# Altium PCB Hack_Final.PcbDoc (part 1 of 3)
Units mm, origin at the board's own origin, x right, y up, seen from the top; angles counter-clockwise.
Board outline 325.37 x 149.48 mm, 4 copper layers (Top Layer, Layer 1, Layer 2, Bottom Layer), stack 0.603 mm thick; 363 components, 196 nets, 927 pads, 198 vias.
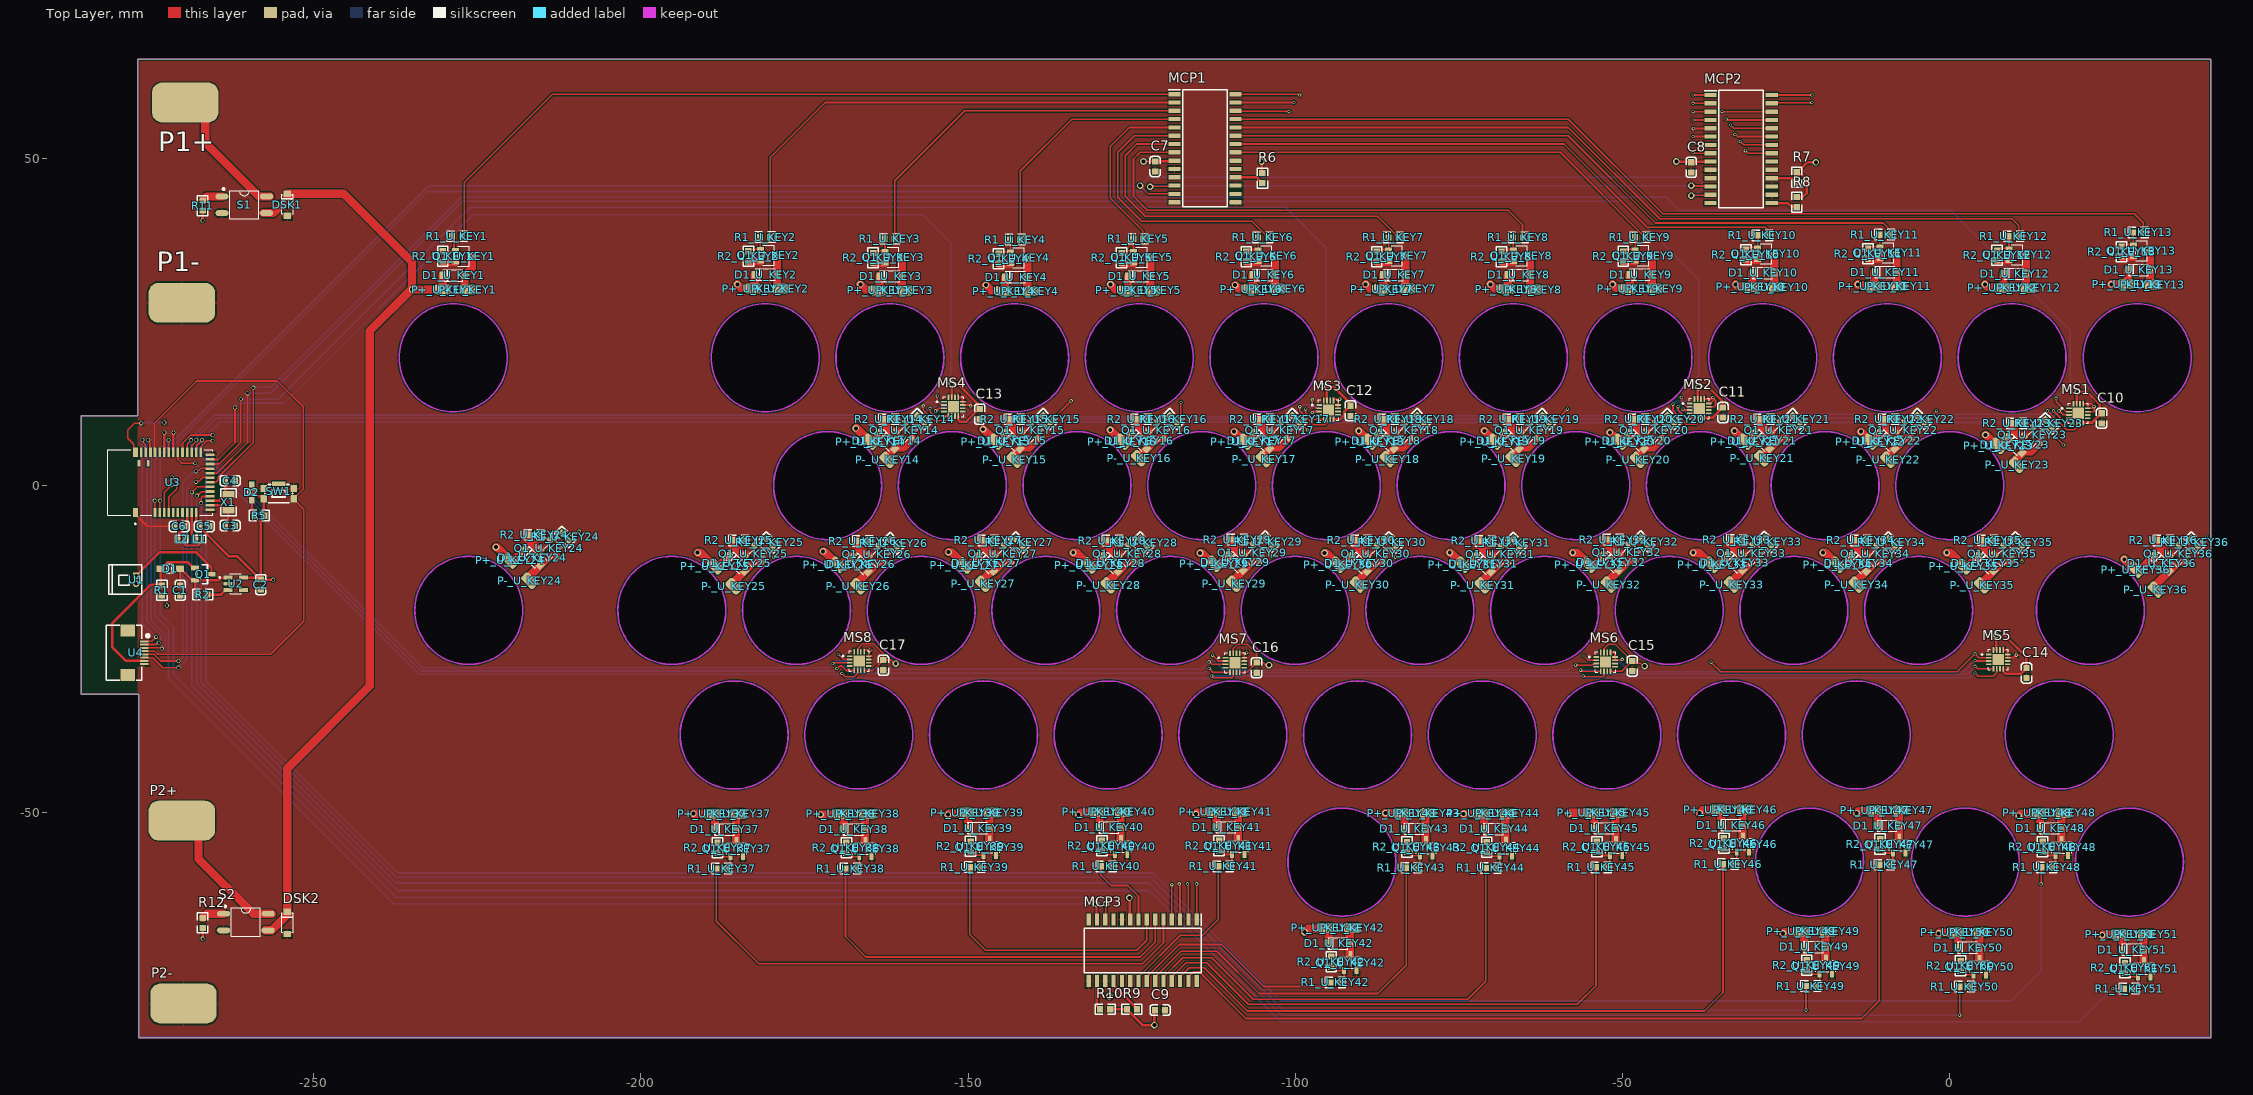
[diagram p0: Top Layer view]
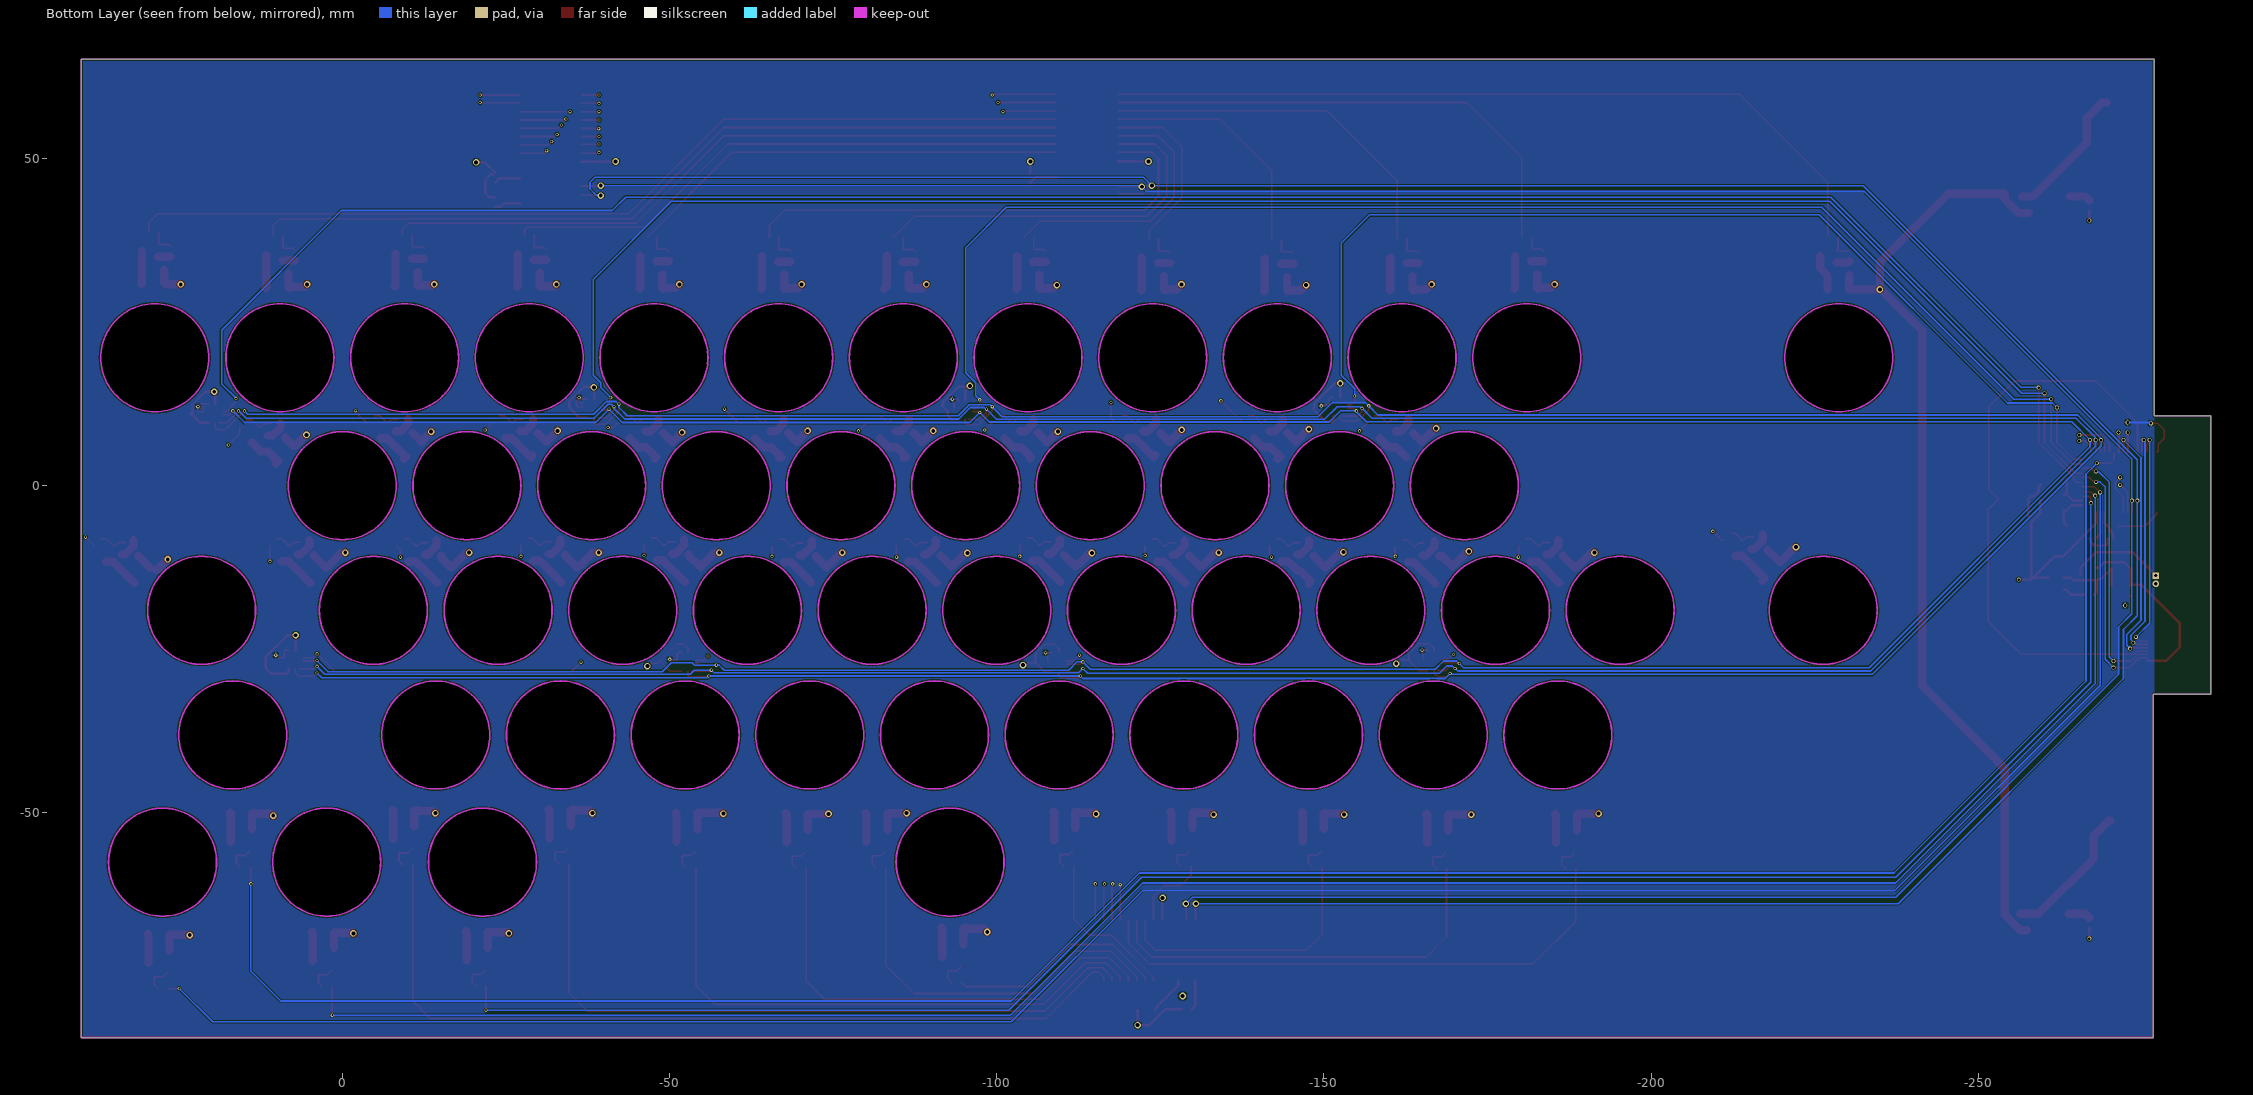
[diagram p1: Bottom Layer view, seen from below]
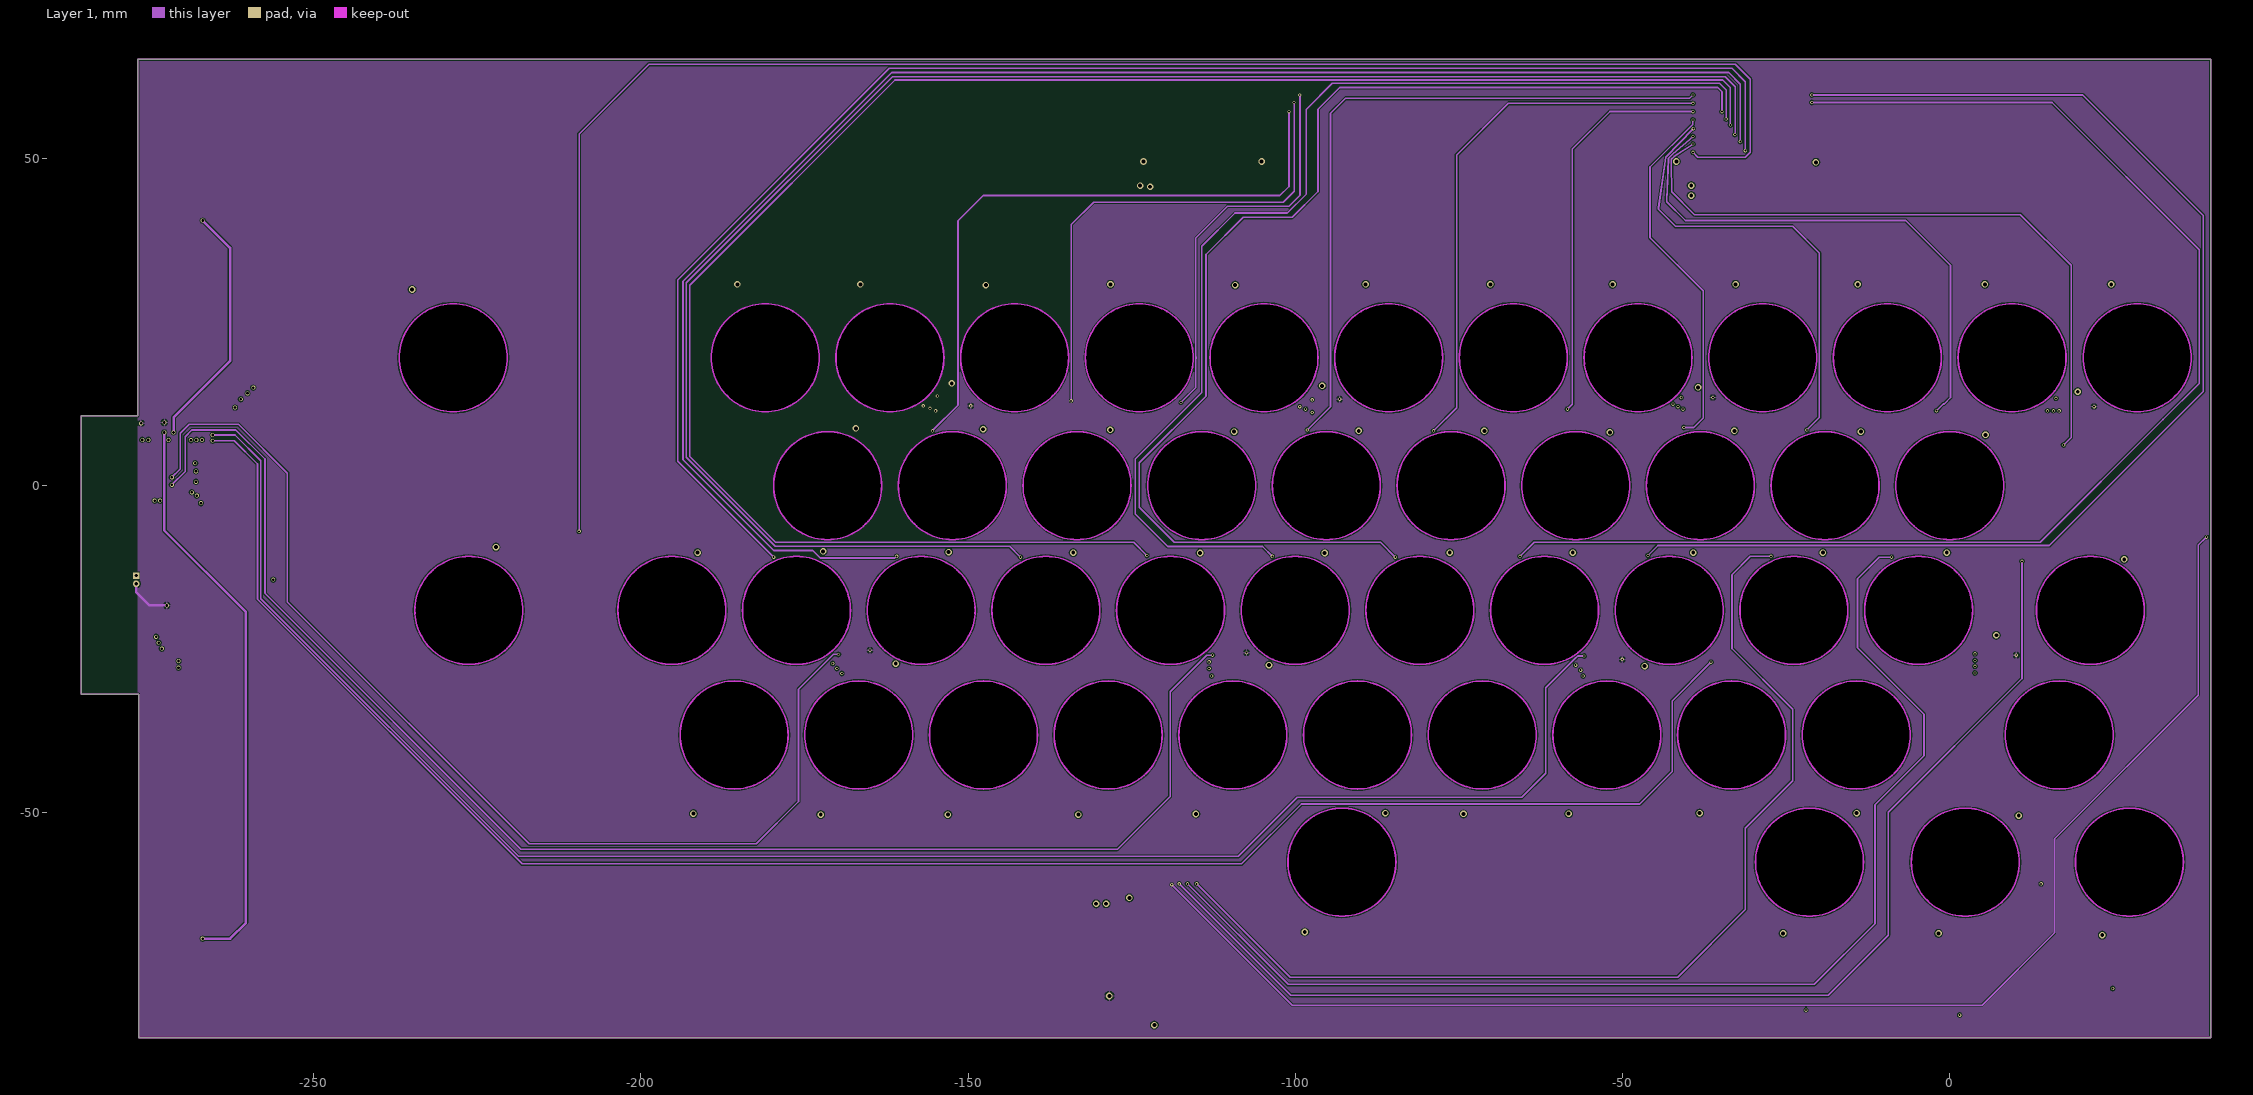
[diagram p2: Layer 1]
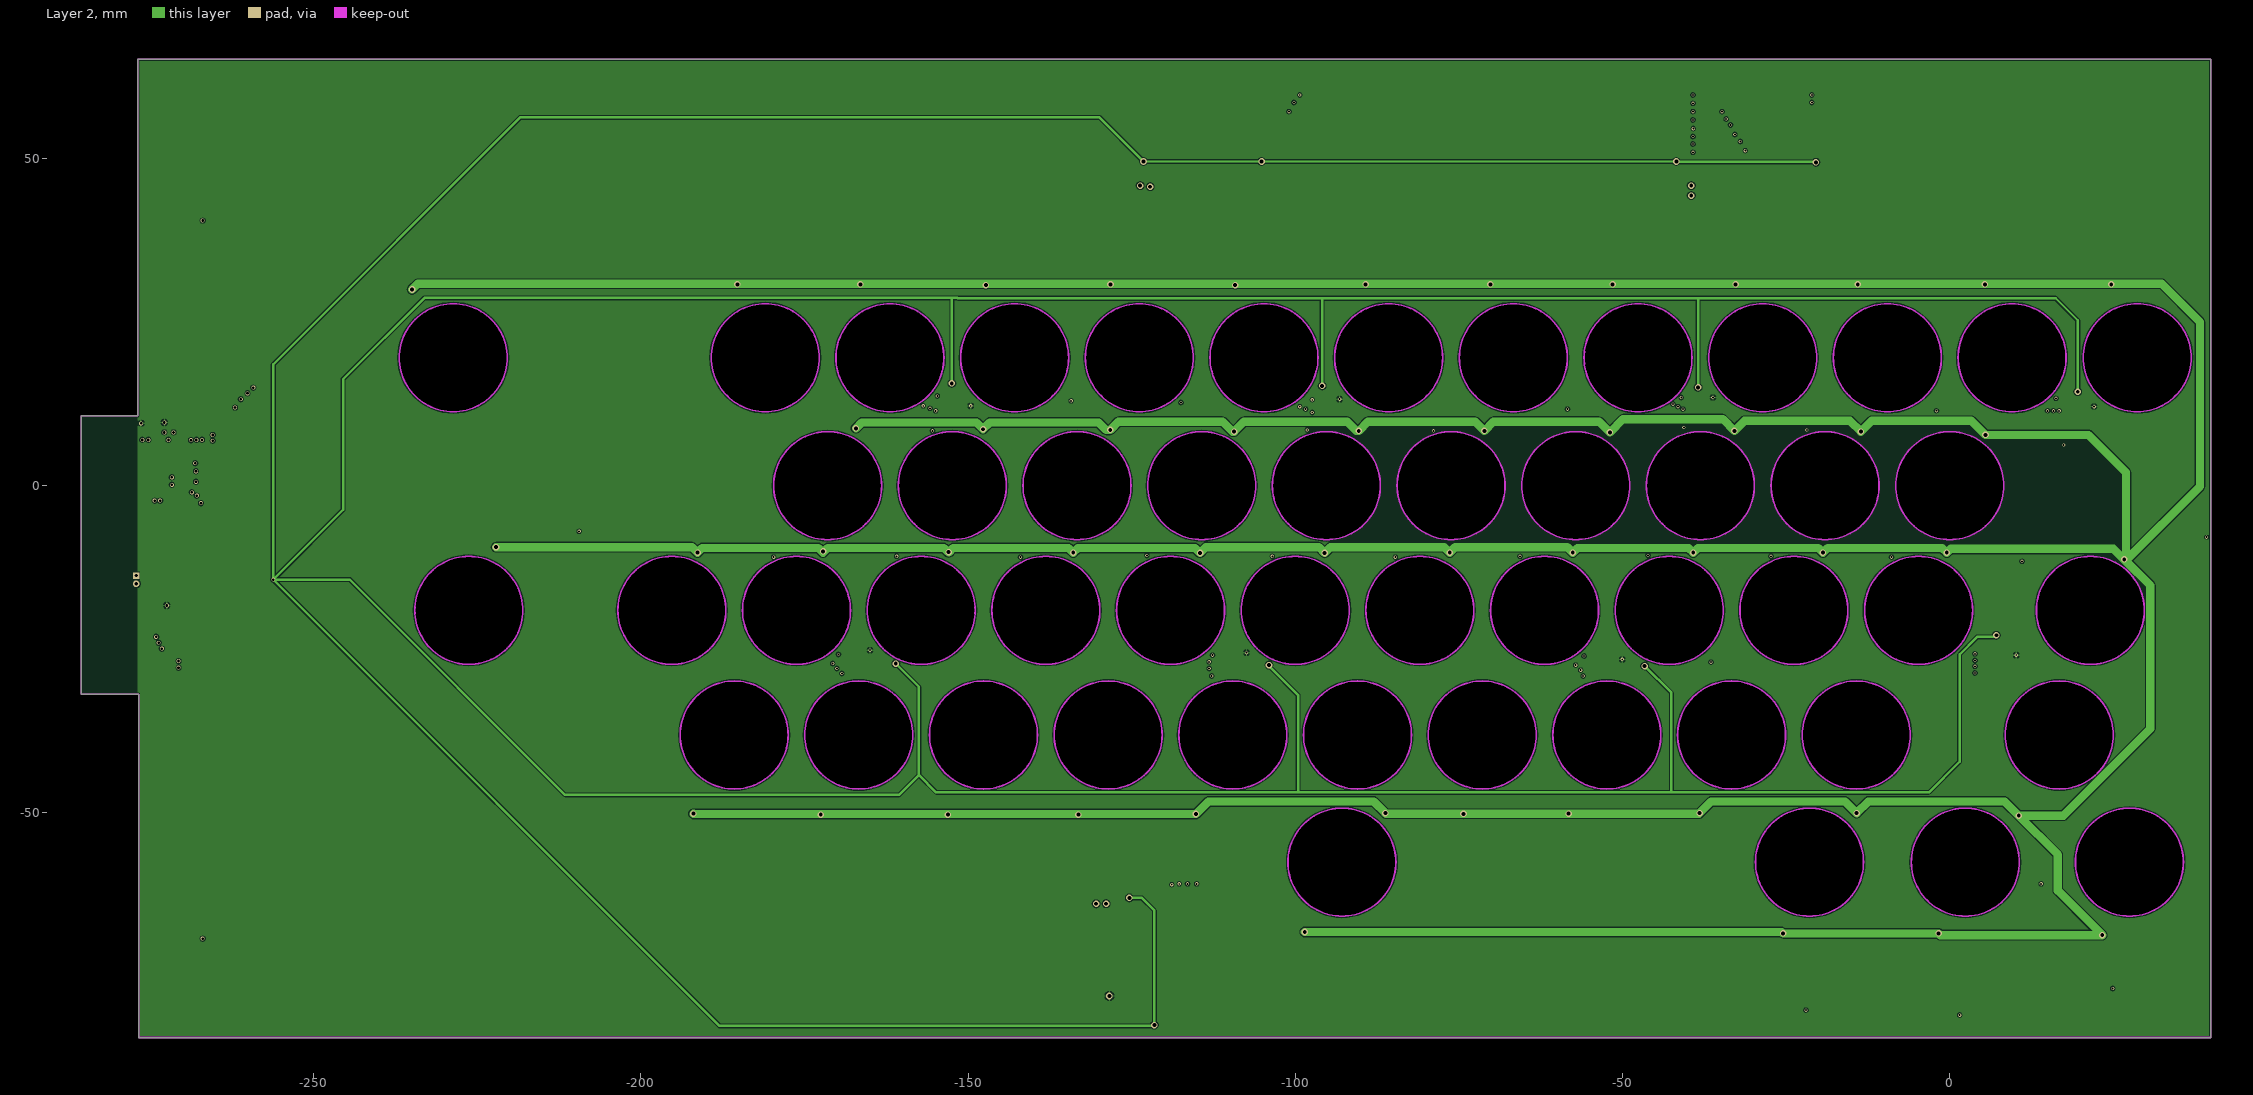
[diagram p3: Layer 2]
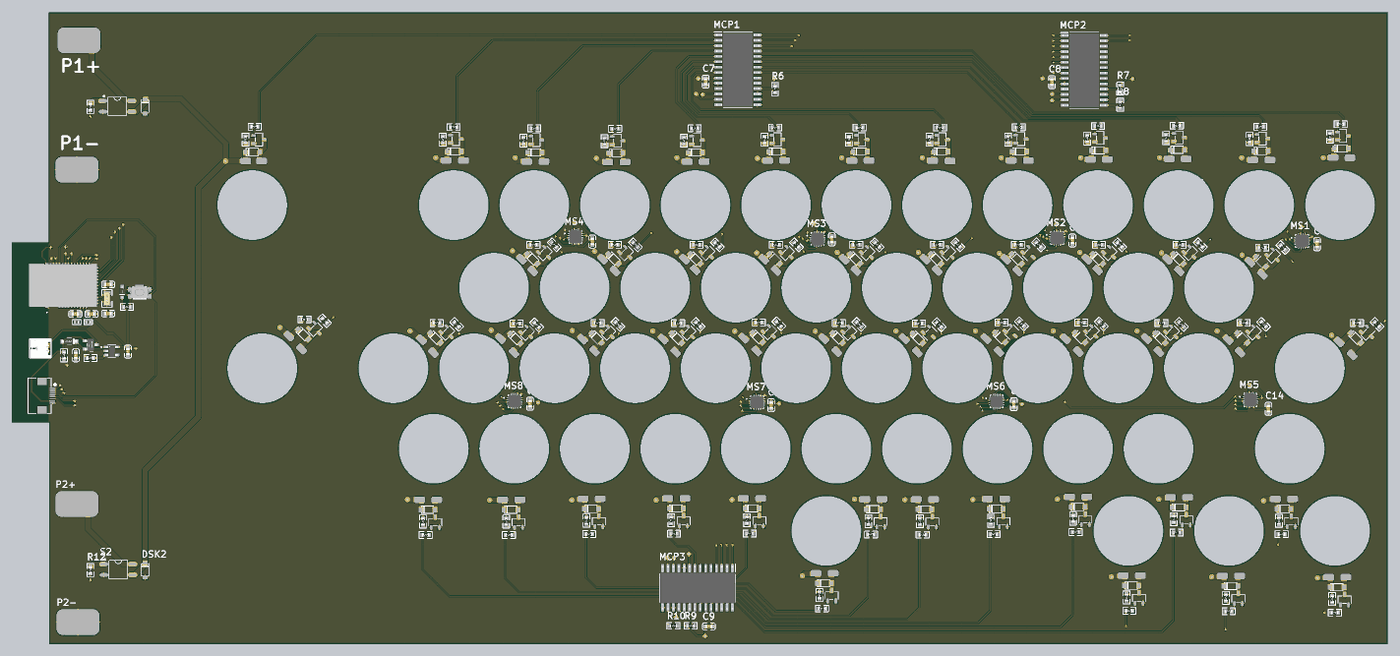
[diagram p6: 3D render of the assembled board from above, using the file's embedded part models]

## Layer stack, top to bottom
Top Solder: solder mask 0.0102, Solder Resist, Dk 3.5
Top Layer: signal copper 0.0356
Dielectric 2: prepreg 0.0711, PP-006, Dk 4.1
Layer 1: signal copper 0.035
Dielectric 1: dielectric 0.32, FR-4, Dk 4.8
Layer 2: signal copper 0.035
Dielectric 3: prepreg 0.0711, PP-006, Dk 4.1
Bottom Layer: signal copper 0.0356
Bottom Solder: solder mask 0.0102, Solder Resist, Dk 3.5

## Board outline
-285.496,-31.877 -285.496,10.668 -276.86,10.668 -276.86,65.151 39.878,65.151 39.878,-84.328 -276.733,-84.328 -276.733,-31.877
cut-out: -184.46,-19.05 ccw(c-176.21,-19.05) -176.21,-27.3 ccw(c-176.21,-19.05) -167.96,-19.05 ccw(c-176.21,-19.05) -176.21,-10.8 ccw(c-176.21,-19.05)
cut-out: -122.55,0 ccw(c-114.3,0) -114.3,-8.25 ccw(c-114.3,0) -106.05,0 ccw(c-114.3,0) -114.3,8.25 ccw(c-114.3,0)
cut-out: -29.68,-57.53 ccw(c-21.43,-57.53) -21.43,-65.78 ccw(c-21.43,-57.53) -13.18,-57.53 ccw(c-21.43,-57.53) -21.43,-49.28 ccw(c-21.43,-57.53)
cut-out: -51.11,-19.05 ccw(c-42.86,-19.05) -42.86,-27.3 ccw(c-42.86,-19.05) -34.61,-19.05 ccw(c-42.86,-19.05) -42.86,-10.8 ccw(c-42.86,-19.05)
cut-out: -27.3,0 ccw(c-19.05,0) -19.05,-8.25 ccw(c-19.05,0) -10.8,0 ccw(c-19.05,0) -19.05,8.25 ccw(c-19.05,0)
cut-out: -165.41,-19.05 ccw(c-157.16,-19.05) -157.16,-27.3 ccw(c-157.16,-19.05) -148.91,-19.05 ccw(c-157.16,-19.05) -157.16,-10.8 ccw(c-157.16,-19.05)
cut-out: -84.45,0 ccw(c-76.2,0) -76.2,-8.25 ccw(c-76.2,0) -67.95,0 ccw(c-76.2,0) -76.2,8.25 ccw(c-76.2,0)
cut-out: 13.245,-19.05 ccw(c21.495,-19.05) 21.495,-27.3 ccw(c21.495,-19.05) 29.745,-19.05 ccw(c21.495,-19.05) 21.495,-10.8 ccw(c21.495,-19.05)
cut-out: 1.27,19.55 ccw(c9.52,19.55) 9.52,11.3 ccw(c9.52,19.55) 17.77,19.55 ccw(c9.52,19.55) 9.52,27.8 ccw(c9.52,19.55)
cut-out: 19.205,-57.53 ccw(c27.455,-57.53) 27.455,-65.78 ccw(c27.455,-57.53) 35.705,-57.53 ccw(c27.455,-57.53) 27.455,-49.28 ccw(c27.455,-57.53)
cut-out: -22.54,-38.1 ccw(c-14.29,-38.1) -14.29,-46.35 ccw(c-14.29,-38.1) -6.04,-38.1 ccw(c-14.29,-38.1) -14.29,-29.85 ccw(c-14.29,-38.1)
cut-out: -5.87,-57.53 ccw(c2.38,-57.53) 2.38,-65.78 ccw(c2.38,-57.53) 10.63,-57.53 ccw(c2.38,-57.53) 2.38,-49.28 ccw(c2.38,-57.53)
cut-out: 8.48,-38.1 ccw(c16.73,-38.1) 16.73,-46.35 ccw(c16.73,-38.1) 24.98,-38.1 ccw(c16.73,-38.1) 16.73,-29.85 ccw(c16.73,-38.1)
cut-out: -17.78,19.55 ccw(c-9.53,19.55) -9.53,11.3 ccw(c-9.53,19.55) -1.28,19.55 ccw(c-9.53,19.55) -9.53,27.8 ccw(c-9.53,19.55)
cut-out: -36.83,19.55 ccw(c-28.58,19.55) -28.58,11.3 ccw(c-28.58,19.55) -20.33,19.55 ccw(c-28.58,19.55) -28.58,27.8 ccw(c-28.58,19.55)
cut-out: -55.88,19.55 ccw(c-47.63,19.55) -47.63,11.3 ccw(c-47.63,19.55) -39.38,19.55 ccw(c-47.63,19.55) -47.63,27.8 ccw(c-47.63,19.55)
cut-out: -74.93,19.55 ccw(c-66.68,19.55) -66.68,11.3 ccw(c-66.68,19.55) -58.43,19.55 ccw(c-66.68,19.55) -66.68,27.8 ccw(c-66.68,19.55)
cut-out: -93.98,19.55 ccw(c-85.73,19.55) -85.73,11.3 ccw(c-85.73,19.55) -77.48,19.55 ccw(c-85.73,19.55) -85.73,27.8 ccw(c-85.73,19.55)
cut-out: -113.03,19.55 ccw(c-104.78,19.55) -104.78,11.3 ccw(c-104.78,19.55) -96.53,19.55 ccw(c-104.78,19.55) -104.78,27.8 ccw(c-104.78,19.55)
cut-out: -132.08,19.55 ccw(c-123.83,19.55) -123.83,11.3 ccw(c-123.83,19.55) -115.58,19.55 ccw(c-123.83,19.55) -123.83,27.8 ccw(c-123.83,19.55)
cut-out: -151.13,19.55 ccw(c-142.88,19.55) -142.88,11.3 ccw(c-142.88,19.55) -134.63,19.55 ccw(c-142.88,19.55) -142.88,27.8 ccw(c-142.88,19.55)
cut-out: -170.18,19.55 ccw(c-161.93,19.55) -161.93,11.3 ccw(c-161.93,19.55) -153.68,19.55 ccw(c-161.93,19.55) -161.93,27.8 ccw(c-161.93,19.55)
cut-out: 20.395,19.55 ccw(c28.645,19.55) 28.645,11.3 ccw(c28.645,19.55) 36.895,19.55 ccw(c28.645,19.55) 28.645,27.8 ccw(c28.645,19.55)
cut-out: -8.25,0 ccw(c0,0) 0,-8.25 ccw(c0,0) 8.25,0 ccw(c0,0) 0,8.25 ccw(c0,0)
cut-out: -179.7,0 ccw(c-171.45,0) -171.45,-8.25 ccw(c-171.45,0) -163.2,0 ccw(c-171.45,0) -171.45,8.25 ccw(c-171.45,0)
cut-out: -160.65,0 ccw(c-152.4,0) -152.4,-8.25 ccw(c-152.4,0) -144.15,0 ccw(c-152.4,0) -152.4,8.25 ccw(c-152.4,0)
cut-out: -60.64,-38.1 ccw(c-52.39,-38.1) -52.39,-46.35 ccw(c-52.39,-38.1) -44.14,-38.1 ccw(c-52.39,-38.1) -52.39,-29.85 ccw(c-52.39,-38.1)
cut-out: -41.59,-38.1 ccw(c-33.34,-38.1) -33.34,-46.35 ccw(c-33.34,-38.1) -25.09,-38.1 ccw(c-33.34,-38.1) -33.34,-29.85 ccw(c-33.34,-38.1)
cut-out: -13.01,-19.05 ccw(c-4.76,-19.05) -4.76,-27.3 ccw(c-4.76,-19.05) 3.49,-19.05 ccw(c-4.76,-19.05) -4.76,-10.8 ccw(c-4.76,-19.05)
cut-out: -32.06,-19.05 ccw(c-23.81,-19.05) -23.81,-27.3 ccw(c-23.81,-19.05) -15.56,-19.05 ccw(c-23.81,-19.05) -23.81,-10.8 ccw(c-23.81,-19.05)
cut-out: -70.16,-19.05 ccw(c-61.91,-19.05) -61.91,-27.3 ccw(c-61.91,-19.05) -53.66,-19.05 ccw(c-61.91,-19.05) -61.91,-10.8 ccw(c-61.91,-19.05)
cut-out: -79.69,-38.1 ccw(c-71.44,-38.1) -71.44,-46.35 ccw(c-71.44,-38.1) -63.19,-38.1 ccw(c-71.44,-38.1) -71.44,-29.85 ccw(c-71.44,-38.1)
cut-out: -101.12,-57.53 ccw(c-92.87,-57.53) -92.87,-65.78 ccw(c-92.87,-57.53) -84.62,-57.53 ccw(c-92.87,-57.53) -92.87,-49.28 ccw(c-92.87,-57.53)
cut-out: -98.74,-38.1 ccw(c-90.49,-38.1) -90.49,-46.35 ccw(c-90.49,-38.1) -82.24,-38.1 ccw(c-90.49,-38.1) -90.49,-29.85 ccw(c-90.49,-38.1)
cut-out: -117.79,-38.1 ccw(c-109.54,-38.1) -109.54,-46.35 ccw(c-109.54,-38.1) -101.29,-38.1 ccw(c-109.54,-38.1) -109.54,-29.85 ccw(c-109.54,-38.1)
cut-out: -89.21,-19.05 ccw(c-80.96,-19.05) -80.96,-27.3 ccw(c-80.96,-19.05) -72.71,-19.05 ccw(c-80.96,-19.05) -80.96,-10.8 ccw(c-80.96,-19.05)
cut-out: -108.26,-19.05 ccw(c-100.01,-19.05) -100.01,-27.3 ccw(c-100.01,-19.05) -91.76,-19.05 ccw(c-100.01,-19.05) -100.01,-10.8 ccw(c-100.01,-19.05)
cut-out: -127.31,-19.05 ccw(c-119.06,-19.05) -119.06,-27.3 ccw(c-119.06,-19.05) -110.81,-19.05 ccw(c-119.06,-19.05) -119.06,-10.8 ccw(c-119.06,-19.05)
cut-out: -146.36,-19.05 ccw(c-138.11,-19.05) -138.11,-27.3 ccw(c-138.11,-19.05) -129.86,-19.05 ccw(c-138.11,-19.05) -138.11,-10.8 ccw(c-138.11,-19.05)
cut-out: -136.84,-38.1 ccw(c-128.59,-38.1) -128.59,-46.35 ccw(c-128.59,-38.1) -120.34,-38.1 ccw(c-128.59,-38.1) -128.59,-29.85 ccw(c-128.59,-38.1)
cut-out: -155.89,-38.1 ccw(c-147.64,-38.1) -147.64,-46.35 ccw(c-147.64,-38.1) -139.39,-38.1 ccw(c-147.64,-38.1) -147.64,-29.85 ccw(c-147.64,-38.1)
cut-out: -174.94,-38.1 ccw(c-166.69,-38.1) -166.69,-46.35 ccw(c-166.69,-38.1) -158.44,-38.1 ccw(c-166.69,-38.1) -166.69,-29.85 ccw(c-166.69,-38.1)
cut-out: -193.99,-38.1 ccw(c-185.74,-38.1) -185.74,-46.35 ccw(c-185.74,-38.1) -177.49,-38.1 ccw(c-185.74,-38.1) -185.74,-29.85 ccw(c-185.74,-38.1)
cut-out: -203.51,-19.05 ccw(c-195.26,-19.05) -195.26,-27.3 ccw(c-195.26,-19.05) -187.01,-19.05 ccw(c-195.26,-19.05) -195.26,-10.8 ccw(c-195.26,-19.05)
cut-out: -234.53,-19.05 ccw(c-226.28,-19.05) -226.28,-27.3 ccw(c-226.28,-19.05) -218.03,-19.05 ccw(c-226.28,-19.05) -226.28,-10.8 ccw(c-226.28,-19.05)
cut-out: -46.35,0 ccw(c-38.1,0) -38.1,-8.25 ccw(c-38.1,0) -29.85,0 ccw(c-38.1,0) -38.1,8.25 ccw(c-38.1,0)
cut-out: -65.4,0 ccw(c-57.15,0) -57.15,-8.25 ccw(c-57.15,0) -48.9,0 ccw(c-57.15,0) -57.15,8.25 ccw(c-57.15,0)
cut-out: -103.5,0 ccw(c-95.25,0) -95.25,-8.25 ccw(c-95.25,0) -87,0 ccw(c-95.25,0) -95.25,8.25 ccw(c-95.25,0)
cut-out: -141.6,0 ccw(c-133.35,0) -133.35,-8.25 ccw(c-133.35,0) -125.1,0 ccw(c-133.35,0) -133.35,8.25 ccw(c-133.35,0)
cut-out: -189.23,19.55 ccw(c-180.98,19.55) -180.98,11.3 ccw(c-180.98,19.55) -172.73,19.55 ccw(c-180.98,19.55) -180.98,27.8 ccw(c-180.98,19.55)
cut-out: -236.91,19.55 ccw(c-228.66,19.55) -228.66,11.3 ccw(c-228.66,19.55) -220.41,19.55 ccw(c-228.66,19.55) -228.66,27.8 ccw(c-228.66,19.55)

## Design rules (kind name [scope] priority, off if disabled: settings)
Clearance [All] p1: gap=0.15 ignorepadtopadclearanceinfootprint=FALSE
PolygonConnect [All] p1: connectstyle=Relief reliefconductorwidth=0.254 reliefentries=4 polygonreliefangle="90 Angle" airgapwidth=0.254
RoutingVias [All] p1: holewidth=0.711 width=1.27 viastyle="Through Hole" minholewidth=0.711 minwidth=1.27 maxholewidth=0.711 maxwidth=1.27
SolderMaskExpansion [All] p1: expansion=0.102 istentingtop=FALSE
Width [All] p1: maxlimit=1.27 minlimit=0.254 preferedwidth=0.381 toplayer_prefwidth=0.254 bottomlayer_prefwidth=0.254 minimp=50.000000 maximp=50.000000 favimp=50.000000
30 further rules are at their usual default settings.

## Classes and differential pairs
component class U_KEY51: D1_U_KEY51 P+_U_KEY51 P-_U_KEY51 Q1_U_KEY51 R1_U_KEY51 R2_U_KEY51
component class U_KEY50: D1_U_KEY50 P+_U_KEY50 P-_U_KEY50 Q1_U_KEY50 R1_U_KEY50 R2_U_KEY50
component class U_KEY49: D1_U_KEY49 P+_U_KEY49 P-_U_KEY49 Q1_U_KEY49 R1_U_KEY49 R2_U_KEY49
component class U_KEY48: D1_U_KEY48 P+_U_KEY48 P-_U_KEY48 Q1_U_KEY48 R1_U_KEY48 R2_U_KEY48
component class U_KEY47: D1_U_KEY47 P+_U_KEY47 P-_U_KEY47 Q1_U_KEY47 R1_U_KEY47 R2_U_KEY47
component class U_KEY46: D1_U_KEY46 P+_U_KEY46 P-_U_KEY46 Q1_U_KEY46 R1_U_KEY46 R2_U_KEY46
component class U_KEY45: D1_U_KEY45 P+_U_KEY45 P-_U_KEY45 Q1_U_KEY45 R1_U_KEY45 R2_U_KEY45
component class U_KEY44: D1_U_KEY44 P+_U_KEY44 P-_U_KEY44 Q1_U_KEY44 R1_U_KEY44 R2_U_KEY44
component class U_KEY43: D1_U_KEY43 P+_U_KEY43 P-_U_KEY43 Q1_U_KEY43 R1_U_KEY43 R2_U_KEY43
component class U_KEY42: D1_U_KEY42 P+_U_KEY42 P-_U_KEY42 Q1_U_KEY42 R1_U_KEY42 R2_U_KEY42
component class U_KEY41: D1_U_KEY41 P+_U_KEY41 P-_U_KEY41 Q1_U_KEY41 R1_U_KEY41 R2_U_KEY41
component class U_KEY40: D1_U_KEY40 P+_U_KEY40 P-_U_KEY40 Q1_U_KEY40 R1_U_KEY40 R2_U_KEY40
channel class KEY: U_KEY1 U_KEY2 U_KEY3 U_KEY4 U_KEY5 U_KEY6 U_KEY7 U_KEY8 U_KEY9 U_KEY10 U_KEY11 U_KEY12 U_KEY13 U_KEY14 U_KEY15 U_KEY16 U_KEY17 U_KEY18 U_KEY19 U_KEY20 U_KEY21 U_KEY22 U_KEY23 U_KEY24 U_KEY25 U_KEY26 U_KEY27 U_KEY28 U_KEY29 U_KEY30 U_KEY31 U_KEY32 U_KEY33 U_KEY34 U_KEY35 U_KEY36 U_KEY37 U_KEY38 U_KEY39 U_KEY40 U_KEY41 U_KEY42 U_KEY43 U_KEY44 U_KEY45 U_KEY46 U_KEY47 U_KEY48 U_KEY49 U_KEY50 U_KEY51
net class KEY[1..51]: KEY1 KEY2 KEY3 KEY4 KEY5 KEY6 KEY7 KEY8 KEY9 KEY10 KEY11 KEY12 KEY13 KEY14 KEY15 KEY16 KEY17 KEY18 KEY19 KEY20 KEY21 KEY22 KEY23 KEY24 KEY25 KEY26 KEY27 KEY28 KEY29 KEY30 KEY31 KEY32 KEY33 KEY34 KEY35 KEY36 KEY37 KEY38 KEY39 KEY40 KEY41 KEY42 KEY43 KEY44 KEY45 KEY46 KEY47 KEY48 KEY49 KEY50 KEY51
component class U_KEY39: D1_U_KEY39 P+_U_KEY39 P-_U_KEY39 Q1_U_KEY39 R1_U_KEY39 R2_U_KEY39
component class U_KEY38: D1_U_KEY38 P+_U_KEY38 P-_U_KEY38 Q1_U_KEY38 R1_U_KEY38 R2_U_KEY38
component class U_KEY37: D1_U_KEY37 P+_U_KEY37 P-_U_KEY37 Q1_U_KEY37 R1_U_KEY37 R2_U_KEY37
component class U_KEY36: D1_U_KEY36 P+_U_KEY36 P-_U_KEY36 Q1_U_KEY36 R1_U_KEY36 R2_U_KEY36
component class U_KEY35: D1_U_KEY35 P+_U_KEY35 P-_U_KEY35 Q1_U_KEY35 R1_U_KEY35 R2_U_KEY35
component class U_KEY34: D1_U_KEY34 P+_U_KEY34 P-_U_KEY34 Q1_U_KEY34 R1_U_KEY34 R2_U_KEY34
component class U_KEY33: D1_U_KEY33 P+_U_KEY33 P-_U_KEY33 Q1_U_KEY33 R1_U_KEY33 R2_U_KEY33
component class U_KEY32: D1_U_KEY32 P+_U_KEY32 P-_U_KEY32 Q1_U_KEY32 R1_U_KEY32 R2_U_KEY32
component class U_KEY31: D1_U_KEY31 P+_U_KEY31 P-_U_KEY31 Q1_U_KEY31 R1_U_KEY31 R2_U_KEY31
component class U_KEY30: D1_U_KEY30 P+_U_KEY30 P-_U_KEY30 Q1_U_KEY30 R1_U_KEY30 R2_U_KEY30
component class U_KEY29: D1_U_KEY29 P+_U_KEY29 P-_U_KEY29 Q1_U_KEY29 R1_U_KEY29 R2_U_KEY29
component class U_KEY28: D1_U_KEY28 P+_U_KEY28 P-_U_KEY28 Q1_U_KEY28 R1_U_KEY28 R2_U_KEY28
component class U_KEY27: D1_U_KEY27 P+_U_KEY27 P-_U_KEY27 Q1_U_KEY27 R1_U_KEY27 R2_U_KEY27
component class U_KEY26: D1_U_KEY26 P+_U_KEY26 P-_U_KEY26 Q1_U_KEY26 R1_U_KEY26 R2_U_KEY26
component class U_KEY25: D1_U_KEY25 P+_U_KEY25 P-_U_KEY25 Q1_U_KEY25 R1_U_KEY25 R2_U_KEY25
component class U_KEY24: D1_U_KEY24 P+_U_KEY24 P-_U_KEY24 Q1_U_KEY24 R1_U_KEY24 R2_U_KEY24
component class U_KEY23: D1_U_KEY23 P+_U_KEY23 P-_U_KEY23 Q1_U_KEY23 R1_U_KEY23 R2_U_KEY23
component class U_KEY22: D1_U_KEY22 P+_U_KEY22 P-_U_KEY22 Q1_U_KEY22 R1_U_KEY22 R2_U_KEY22
component class U_KEY21: D1_U_KEY21 P+_U_KEY21 P-_U_KEY21 Q1_U_KEY21 R1_U_KEY21 R2_U_KEY21
component class U_KEY20: D1_U_KEY20 P+_U_KEY20 P-_U_KEY20 Q1_U_KEY20 R1_U_KEY20 R2_U_KEY20
component class U_KEY19: D1_U_KEY19 P+_U_KEY19 P-_U_KEY19 Q1_U_KEY19 R1_U_KEY19 R2_U_KEY19
component class U_KEY18: D1_U_KEY18 P+_U_KEY18 P-_U_KEY18 Q1_U_KEY18 R1_U_KEY18 R2_U_KEY18
component class U_KEY17: D1_U_KEY17 P+_U_KEY17 P-_U_KEY17 Q1_U_KEY17 R1_U_KEY17 R2_U_KEY17
component class U_KEY16: D1_U_KEY16 P+_U_KEY16 P-_U_KEY16 Q1_U_KEY16 R1_U_KEY16 R2_U_KEY16
component class U_KEY15: D1_U_KEY15 P+_U_KEY15 P-_U_KEY15 Q1_U_KEY15 R1_U_KEY15 R2_U_KEY15
component class U_KEY14: D1_U_KEY14 P+_U_KEY14 P-_U_KEY14 Q1_U_KEY14 R1_U_KEY14 R2_U_KEY14
component class U_KEY13: D1_U_KEY13 P+_U_KEY13 P-_U_KEY13 Q1_U_KEY13 R1_U_KEY13 R2_U_KEY13
component class U_KEY12: D1_U_KEY12 P+_U_KEY12 P-_U_KEY12 Q1_U_KEY12 R1_U_KEY12 R2_U_KEY12
component class U_KEY11: D1_U_KEY11 P+_U_KEY11 P-_U_KEY11 Q1_U_KEY11 R1_U_KEY11 R2_U_KEY11
component class U_KEY10: D1_U_KEY10 P+_U_KEY10 P-_U_KEY10 Q1_U_KEY10 R1_U_KEY10 R2_U_KEY10
component class U_KEY9: D1_U_KEY9 P+_U_KEY9 P-_U_KEY9 Q1_U_KEY9 R1_U_KEY9 R2_U_KEY9
component class U_KEY8: D1_U_KEY8 P+_U_KEY8 P-_U_KEY8 Q1_U_KEY8 R1_U_KEY8 R2_U_KEY8
component class U_KEY7: D1_U_KEY7 P+_U_KEY7 P-_U_KEY7 Q1_U_KEY7 R1_U_KEY7 R2_U_KEY7
component class U_KEY6: D1_U_KEY6 P+_U_KEY6 P-_U_KEY6 Q1_U_KEY6 R1_U_KEY6 R2_U_KEY6
component class U_KEY5: D1_U_KEY5 P+_U_KEY5 P-_U_KEY5 Q1_U_KEY5 R1_U_KEY5 R2_U_KEY5
component class U_KEY4: D1_U_KEY4 P+_U_KEY4 P-_U_KEY4 Q1_U_KEY4 R1_U_KEY4 R2_U_KEY4
component class U_KEY3: D1_U_KEY3 P+_U_KEY3 P-_U_KEY3 Q1_U_KEY3 R1_U_KEY3 R2_U_KEY3
component class U_KEY2: D1_U_KEY2 P+_U_KEY2 P-_U_KEY2 Q1_U_KEY2 R1_U_KEY2 R2_U_KEY2
component class U_KEY1: D1_U_KEY1 P+_U_KEY1 P-_U_KEY1 Q1_U_KEY1 R1_U_KEY1 R2_U_KEY1
component class Hack_Final: C1 C2 C3 C4 C5 C6 C7 C8 C9 C10 C11 C12 C13 C14 C15 C16 C17 D1 D2 DSK1 DSK2 L1 L2 MCP1 MCP2 MCP3 MCU1 MS1 MS2 MS3 MS4 MS5 MS6 MS7 MS8 P1+ P1- P2+ P2- Q1 R1 R2 R5 R6 R7 R8 R9 R10 R11 R12 S1 S2 SW1 U1 U2 U3 U4 X1

## Components (designator, comment, footprint, x,y, rotation, side; value= is the part's Value field where it differs from the comment)
C1 "1uF" 0603_C -270.383,-16.002 r90 top
C2 "1uF" 0603_C -258.064,-15.113 r90 top
C3 "1uF" 0603_C -262.763,-6.096 r0 top
C4 "1uF" 0603_C -262.763,0.762 r0 top
C5 "1uF" 0603_C -266.7,-6.223 r180 top
C6 "1uF" 0603_C -270.518,-6.223 r0 top
C7 "0.1uF" 0603_C -121.412,48.76 r270 top
C8 "0.1uF" 0603_C -39.497,48.641 r270 top
C9 "0.1uF" 0603_C -120.65,-80.137 r0 top
C10 "0.1uF" 0603_C 23.203,10.299 r90 top
C11 "0.1uF" 0603_C -34.671,11.176 r90 top
C12 "0.1uF" 0603_C -91.567,11.445 r90 top
C13 "0.1uF" 0603_C -148.209,10.922 r90 top
C14 "0.1uF" 0603_C 11.727,-28.631 r90 top
C15 "0.1uF" 0603_C -48.514,-27.559 r90 top
C16 "0.1uF" 0603_C -105.918,-27.821 r90 top
C17 "0.1uF" 0603_C -162.941,-27.44 r90 top
D1 "LMBR120FT1G" SOD-123 -271.907,-12.7 r180 top
D1_U_KEY1 "DSK16" DSK16 -228.6,32.131 r0 top (schematic designator D1)
D1_U_KEY2 "DSK16" DSK16 -180.889,32.258 r0 top (schematic designator D1)
D1_U_KEY3 "DSK16" DSK16 -161.839,32.004 r0 top (schematic designator D1)
D1_U_KEY4 "DSK16" DSK16 -142.662,31.877 r0 top (schematic designator D1)
D1_U_KEY5 "DSK16" DSK16 -123.866,32.004 r0 top (schematic designator D1)
D1_U_KEY6 "DSK16" DSK16 -104.816,32.207 r0 top (schematic designator D1)
D1_U_KEY7 "DSK16" DSK16 -84.877,32.207 r0 top (schematic designator D1)
D1_U_KEY8 "DSK16" DSK16 -65.827,32.207 r0 top (schematic designator D1)
D1_U_KEY9 "DSK16" DSK16 -47.225,32.243 r0 top (schematic designator D1)
D1_U_KEY10 "DSK16" DSK16 -28.489,32.517 r0 top (schematic designator D1)
D1_U_KEY11 "DSK16" DSK16 -9.82,32.639 r0 top (schematic designator D1)
D1_U_KEY12 "DSK16" DSK16 9.906,32.385 r0 top (schematic designator D1)
D1_U_KEY13 "DSK16" DSK16 28.915,32.969 r0 top (schematic designator D1)
D1_U_KEY14 "DSK16" DSK16 -162.433,6.858 r315 top (schematic designator D1)
D1_U_KEY15 "DSK16" DSK16 -143.221,6.858 r315 top (schematic designator D1)
D1_U_KEY16 "DSK16" DSK16 -123.861,6.858 r315 top (schematic designator D1)
D1_U_KEY17 "DSK16" DSK16 -105.107,6.858 r315 top (schematic designator D1)
D1_U_KEY18 "DSK16" DSK16 -86.076,6.858 r315 top (schematic designator D1)
D1_U_KEY19 "DSK16" DSK16 -66.965,6.858 r315 top (schematic designator D1)
D1_U_KEY20 "DSK16" DSK16 -47.844,6.858 r315 top (schematic designator D1)
D1_U_KEY21 "DSK16" DSK16 -28.672,6.858 r315 top (schematic designator D1)
D1_U_KEY22 "DSK16" DSK16 -9.617,6.858 r315 top (schematic designator D1)
D1_U_KEY23 "DSK16" DSK16 9.913,6.213 r315 top (schematic designator D1)
D1_U_KEY24 "DSK16" DSK16 -216.589,-10.995 r315 top (schematic designator D1)
D1_U_KEY25 "DSK16" DSK16 -185.338,-11.856 r315 top (schematic designator D1)
D1_U_KEY26 "DSK16" DSK16 -166.415,-11.983 r315 top (schematic designator D1)
D1_U_KEY27 "DSK16" DSK16 -147.238,-11.856 r315 top (schematic designator D1)
D1_U_KEY28 "DSK16" DSK16 -128.232,-11.885 r315 top (schematic designator D1)
D1_U_KEY29 "DSK16" DSK16 -109.138,-11.729 r315 top (schematic designator D1)
D1_U_KEY30 "DSK16" DSK16 -90.215,-11.856 r315 top (schematic designator D1)
D1_U_KEY31 "DSK16" DSK16 -71.247,-11.938 r315 top (schematic designator D1)
D1_U_KEY32 "DSK16" DSK16 -51.734,-11.729 r315 top (schematic designator D1)
D1_U_KEY33 "DSK16" DSK16 -32.855,-11.758 r315 top (schematic designator D1)
D1_U_KEY34 "DSK16" DSK16 -13.916,-11.865 r315 top (schematic designator D1)
D1_U_KEY35 "DSK16" DSK16 5.515,-11.84 r315 top (schematic designator D1)
D1_U_KEY36 "DSK16" DSK16 32.36,-11.856 r315 top (schematic designator D1)
D1_U_KEY37 "DSK16" DSK16 -187.137,-52.534 r0 top (schematic designator D1)
D1_U_KEY38 "DSK16" DSK16 -167.452,-52.534 r0 top (schematic designator D1)
D1_U_KEY39 "DSK16" DSK16 -148.463,-52.324 r0 top (schematic designator D1)
D1_U_KEY40 "DSK16" DSK16 -128.4,-52.214 r0 top (schematic designator D1)
D1_U_KEY41 "DSK16" DSK16 -110.49,-52.197 r0 top (schematic designator D1)
D1_U_KEY42 "DSK16" DSK16 -93.362,-69.941 r0 top (schematic designator D1)
D1_U_KEY43 "DSK16" DSK16 -81.788,-52.416 r0 top (schematic designator D1)
D1_U_KEY44 "DSK16" DSK16 -69.596,-52.451 r0 top (schematic designator D1)
D1_U_KEY45 "DSK16" DSK16 -52.766,-52.359 r0 top (schematic designator D1)
D1_U_KEY46 "DSK16" DSK16 -33.369,-51.851 r0 top (schematic designator D1)
D1_U_KEY47 "DSK16" DSK16 -9.498,-51.961 r0 top (schematic designator D1)
D1_U_KEY48 "DSK16" DSK16 15.326,-52.359 r0 top (schematic designator D1)
D1_U_KEY49 "DSK16" DSK16 -20.701,-70.485 r0 top (schematic designator D1)
D1_U_KEY50 "DSK16" DSK16 2.794,-70.577 r0 top (schematic designator D1)
D1_U_KEY51 "DSK16" DSK16 27.918,-70.883 r0 top (schematic designator D1)
D2 "1N4148" SOD-323F -259.437,-1.02 r90 top
DSK1 "DSK16" DSK16 -254,42.926 r270 top
DSK2 "DSK16" DSK16 -254,-66.802 r270 top
L1 "10uH" 0402_L -267.462,-8.128 r0 top
L2 "15nH" 0402_L -270.173,-8.128 r180 top
MCP1 "MCP23017T-E_SO" SOIC127P1030X265-28N -113.792,51.562 r0 top
MCP2 "MCP23017T-E_SO" SOIC127P1030X265-28N -31.877,51.435 r0 top
MCP3 "MCP23017T-E_SO" SOIC127P1030X265-28N -123.317,-70.993 r270 top
MS1 "MLX90393SLW ABA 011 RE" VQFN-16_EP_3.0x3.0xo.5P 19.647,11.061 r0 top
MS2 "MLX90393SLW ABA 011 RE" VQFN-16_EP_3.0x3.0xo.5P -38.265,11.799 r0 top
MS3 "MLX90393SLW ABA 011 RE" VQFN-16_EP_3.0x3.0xo.5P -94.907,11.576 r0 top
MS4 "MLX90393SLW ABA 011 RE" VQFN-16_EP_3.0x3.0xo.5P -152.235,12.069 r0 top
MS5 "MLX90393SLW ABA 011 RE" VQFN-16_EP_3.0x3.0xo.5P 7.421,-26.553 r0 top
MS6 "MLX90393SLW ABA 011 RE" VQFN-16_EP_3.0x3.0xo.5P -52.578,-26.924 r0 top
MS7 "MLX90393SLW ABA 011 RE" VQFN-16_EP_3.0x3.0xo.5P -109.22,-27.051 r0 top
MS8 "MLX90393SLW ABA 011 RE" VQFN-16_EP_3.0x3.0xo.5P -166.624,-26.797 r0 top
P1+ "padding" PADDING2 -269.621,58.547 r180 top
P1- "padding" PADDING2 -270.129,27.94 r180 top
P2+ "padding" PADDING2 -270.129,-51.181 r180 top
P2- "padding" PADDING2 -269.875,-79.121 r180 top
P+_U_KEY1 "padding" PADDING1#1 -230.251,29.972 r0 top (schematic designator P+)
P+_U_KEY2 "padding" PADDING1#1 -182.794,30.099 r180 top (schematic designator P+)
P+_U_KEY3 "padding" PADDING1#1 -163.744,29.845 r180 top (schematic designator P+)
P+_U_KEY4 "padding" PADDING1#1 -144.567,29.718 r180 top (schematic designator P+)
P+_U_KEY5 "padding" PADDING1#1 -125.771,29.845 r180 top (schematic designator P+)
P+_U_KEY6 "padding" PADDING1#1 -106.721,30.048 r180 top (schematic designator P+)
P+_U_KEY7 "padding" PADDING1#1 -86.782,30.048 r180 top (schematic designator P+)
P+_U_KEY8 "padding" PADDING1#1 -67.732,30.048 r180 top (schematic designator P+)
P+_U_KEY9 "padding" PADDING1#1 -49.13,30.084 r180 top (schematic designator P+)
P+_U_KEY10 "padding" PADDING1#1 -30.394,30.358 r180 top (schematic designator P+)
P+_U_KEY11 "padding" PADDING1#1 -11.725,30.48 r180 top (schematic designator P+)
P+_U_KEY12 "padding" PADDING1#1 8.001,30.226 r180 top (schematic designator P+)
P+_U_KEY13 "padding" PADDING1#1 27.01,30.81 r180 top (schematic designator P+)
P+_U_KEY14 "padding" PADDING1#2 -164.973,6.731 r180 top (schematic designator P+)
P+_U_KEY15 "padding" PADDING1#2 -145.761,6.731 r180 top (schematic designator P+)
P+_U_KEY16 "padding" PADDING1#2 -126.401,6.731 r180 top (schematic designator P+)
P+_U_KEY17 "padding" PADDING1#2 -107.647,6.731 r180 top (schematic designator P+)
P+_U_KEY18 "padding" PADDING1#2 -88.616,6.731 r180 top (schematic designator P+)
P+_U_KEY19 "padding" PADDING1#2 -69.505,6.731 r180 top (schematic designator P+)
P+_U_KEY20 "padding" PADDING1#2 -50.384,6.731 r180 top (schematic designator P+)
P+_U_KEY21 "padding" PADDING1#2 -31.212,6.731 r180 top (schematic designator P+)
P+_U_KEY22 "padding" PADDING1#2 -12.157,6.731 r180 top (schematic designator P+)
P+_U_KEY23 "padding" PADDING1#2 7.373,6.086 r180 top (schematic designator P+)
P+_U_KEY24 "padding" PADDING1#2 -219.964,-11.43 r180 top (schematic designator P+)
P+_U_KEY25 "padding" PADDING1#2 -188.595,-12.319 r180 top (schematic designator P+)
P+_U_KEY26 "padding" PADDING1#2 -169.926,-12.065 r180 top (schematic designator P+)
P+_U_KEY27 "padding" PADDING1#2 -150.495,-12.192 r180 top (schematic designator P+)
P+_U_KEY28 "padding" PADDING1#2 -131.445,-12.192 r180 top (schematic designator P+)
P+_U_KEY29 "padding" PADDING1#2 -112.395,-11.938 r180 top (schematic designator P+)
P+_U_KEY30 "padding" PADDING1#2 -93.472,-12.065 r180 top (schematic designator P+)
P+_U_KEY31 "padding" PADDING1#2 -74.422,-12.065 r180 top (schematic designator P+)
P+_U_KEY32 "padding" PADDING1#2 -55.118,-12.065 r180 top (schematic designator P+)
P+_U_KEY33 "padding" PADDING1#2 -36.322,-12.065 r180 top (schematic designator P+)
P+_U_KEY34 "padding" PADDING1#2 -17.145,-12.065 r180 top (schematic designator P+)
P+_U_KEY35 "padding" PADDING1#2 2.159,-12.319 r180 top (schematic designator P+)
P+_U_KEY36 "padding" PADDING1#2 28.448,-12.827 r180 top (schematic designator P+)
P+_U_KEY37 "padding" PADDING1#1 -189.103,-50.165 r180 top (schematic designator P+)
P+_U_KEY38 "padding" PADDING1#1 -169.418,-50.165 r180 top (schematic designator P+)
P+_U_KEY39 "padding" PADDING1#1 -150.429,-49.955 r180 top (schematic designator P+)
P+_U_KEY40 "padding" PADDING1#1 -130.366,-49.845 r180 top (schematic designator P+)
P+_U_KEY41 "padding" PADDING1#1 -112.456,-49.828 r180 top (schematic designator P+)
P+_U_KEY42 "padding" PADDING1#1 -95.328,-67.571 r180 top (schematic designator P+)
P+_U_KEY43 "padding" PADDING1#1 -83.754,-50.047 r180 top (schematic designator P+)
P+_U_KEY44 "padding" PADDING1#1 -71.562,-50.082 r180 top (schematic designator P+)
P+_U_KEY45 "padding" PADDING1#1 -54.732,-49.99 r180 top (schematic designator P+)
P+_U_KEY46 "padding" PADDING1#1 -35.335,-49.482 r180 top (schematic designator P+)
P+_U_KEY47 "padding" PADDING1#1 -11.464,-49.592 r180 top (schematic designator P+)
P+_U_KEY48 "padding" PADDING1#1 13.36,-49.99 r180 top (schematic designator P+)
P+_U_KEY49 "padding" PADDING1#1 -22.667,-68.116 r180 top (schematic designator P+)
P+_U_KEY50 "padding" PADDING1#1 0.828,-68.208 r180 top (schematic designator P+)
P+_U_KEY51 "padding" PADDING1#1 25.952,-68.514 r180 top (schematic designator P+)
P-_U_KEY1 "padding" PADDING1#1 -226.441,29.972 r0 top (schematic designator P-)
P-_U_KEY2 "padding" PADDING1#1 -178.689,30.099 r180 top (schematic designator P-)
P-_U_KEY3 "padding" PADDING1#1 -159.639,29.845 r180 top (schematic designator P-)
P-_U_KEY4 "padding" PADDING1#1 -140.462,29.718 r180 top (schematic designator P-)
P-_U_KEY5 "padding" PADDING1#1 -121.793,29.845 r180 top (schematic designator P-)
P-_U_KEY6 "padding" PADDING1#1 -102.743,30.099 r180 top (schematic designator P-)
P-_U_KEY7 "padding" PADDING1#1 -82.804,30.099 r180 top (schematic designator P-)
P-_U_KEY8 "padding" PADDING1#1 -63.627,29.972 r180 top (schematic designator P-)
P-_U_KEY9 "padding" PADDING1#1 -45.085,30.099 r180 top (schematic designator P-)
P-_U_KEY10 "padding" PADDING1#1 -26.416,30.353 r180 top (schematic designator P-)
P-_U_KEY11 "padding" PADDING1#1 -7.747,30.48 r180 top (schematic designator P-)
P-_U_KEY12 "padding" PADDING1#1 12.065,30.226 r180 top (schematic designator P-)
P-_U_KEY13 "padding" PADDING1#1 30.988,30.734 r180 top (schematic designator P-)
P-_U_KEY14 "padding" PADDING1#2 -162.306,3.937 r180 top (schematic designator P-)
P-_U_KEY15 "padding" PADDING1#2 -142.851,3.964 r180 top (schematic designator P-)
P-_U_KEY16 "padding" PADDING1#2 -123.869,4.201 r180 top (schematic designator P-)
P-_U_KEY17 "padding" PADDING1#2 -104.775,4.064 r180 top (schematic designator P-)
P-_U_KEY18 "padding" PADDING1#2 -85.852,4.064 r180 top (schematic designator P-)
P-_U_KEY19 "padding" PADDING1#2 -66.651,4.091 r180 top (schematic designator P-)
P-_U_KEY20 "padding" PADDING1#2 -47.625,3.937 r180 top (schematic designator P-)
P-_U_KEY21 "padding" PADDING1#2 -28.68,4.201 r180 top (schematic designator P-)
P-_U_KEY22 "padding" PADDING1#2 -9.374,3.964 r180 top (schematic designator P-)
P-_U_KEY23 "padding" PADDING1#2 10.287,3.175 r180 top (schematic designator P-)
P-_U_KEY24 "padding" PADDING1#2 -217.006,-14.515 r180 top (schematic designator P-)
P-_U_KEY25 "padding" PADDING1#2 -185.801,-15.367 r180 top (schematic designator P-)
P-_U_KEY26 "padding" PADDING1#2 -166.751,-15.367 r180 top (schematic designator P-)
P-_U_KEY27 "padding" PADDING1#2 -147.701,-14.986 r180 top (schematic designator P-)
P-_U_KEY28 "padding" PADDING1#2 -128.524,-15.24 r180 top (schematic designator P-)
P-_U_KEY29 "padding" PADDING1#2 -109.347,-14.986 r180 top (schematic designator P-)
P-_U_KEY30 "padding" PADDING1#2 -90.424,-15.113 r180 top (schematic designator P-)
P-_U_KEY31 "padding" PADDING1#2 -71.374,-15.24 r180 top (schematic designator P-)
P-_U_KEY32 "padding" PADDING1#2 -52.07,-15.113 r180 top (schematic designator P-)
P-_U_KEY33 "padding" PADDING1#2 -33.274,-15.113 r180 top (schematic designator P-)
P-_U_KEY34 "padding" PADDING1#2 -14.224,-15.113 r180 top (schematic designator P-)
P-_U_KEY35 "padding" PADDING1#2 4.953,-15.24 r180 top (schematic designator P-)
P-_U_KEY36 "padding" PADDING1#2 31.496,-15.875 r180 top (schematic designator P-)
P-_U_KEY37 "padding" PADDING1#1 -185.039,-50.165 r180 top (schematic designator P-)
P-_U_KEY38 "padding" PADDING1#1 -165.354,-50.165 r180 top (schematic designator P-)
P-_U_KEY39 "padding" PADDING1#1 -146.365,-49.955 r180 top (schematic designator P-)
P-_U_KEY40 "padding" PADDING1#1 -126.302,-49.845 r180 top (schematic designator P-)
P-_U_KEY41 "padding" PADDING1#1 -108.392,-49.828 r180 top (schematic designator P-)
P-_U_KEY42 "padding" PADDING1#1 -91.264,-67.571 r180 top (schematic designator P-)
P-_U_KEY43 "padding" PADDING1#1 -79.69,-50.047 r180 top (schematic designator P-)
P-_U_KEY44 "padding" PADDING1#1 -67.498,-50.082 r180 top (schematic designator P-)
P-_U_KEY45 "padding" PADDING1#1 -50.668,-49.99 r180 top (schematic designator P-)
P-_U_KEY46 "padding" PADDING1#1 -31.271,-49.482 r180 top (schematic designator P-)
P-_U_KEY47 "padding" PADDING1#1 -7.4,-49.592 r180 top (schematic designator P-)
P-_U_KEY48 "padding" PADDING1#1 17.424,-49.99 r180 top (schematic designator P-)
P-_U_KEY49 "padding" PADDING1#1 -18.603,-68.116 r180 top (schematic designator P-)
P-_U_KEY50 "padding" PADDING1#1 4.892,-68.208 r180 top (schematic designator P-)
P-_U_KEY51 "padding" PADDING1#1 30.016,-68.514 r180 top (schematic designator P-)
Q1 "SI2301CDS-T1-GE3" SOT-23(SOT-23-3) -266.847,-13.528 r180 top
Q1_U_KEY1 "AO3442" AO3442 -227.076,35.052 r180 top (schematic designator Q1)
Q1_U_KEY2 "AO3442" AO3442 -180.508,35.179 r180 top (schematic designator Q1)
Q1_U_KEY3 "AO3442" AO3442 -161.458,34.925 r180 top (schematic designator Q1)
Q1_U_KEY4 "AO3442" AO3442 -142.281,34.798 r180 top (schematic designator Q1)
Q1_U_KEY5 "AO3442" AO3442 -123.485,34.925 r180 top (schematic designator Q1)
Q1_U_KEY6 "AO3442" AO3442 -104.435,35.128 r180 top (schematic designator Q1)
Q1_U_KEY7 "AO3442" AO3442 -84.496,35.128 r180 top (schematic designator Q1)
Q1_U_KEY8 "AO3442" AO3442 -65.446,35.128 r180 top (schematic designator Q1)
Q1_U_KEY9 "AO3442" AO3442 -46.844,35.164 r180 top (schematic designator Q1)
Q1_U_KEY10 "AO3442" AO3442 -28.108,35.438 r180 top (schematic designator Q1)
Q1_U_KEY11 "AO3442" AO3442 -9.439,35.56 r180 top (schematic designator Q1)
Q1_U_KEY12 "AO3442" AO3442 10.287,35.306 r180 top (schematic designator Q1)
Q1_U_KEY13 "AO3442" AO3442 29.296,35.89 r180 top (schematic designator Q1)
Q1_U_KEY14 "AO3442" AO3442 -159.399,8.099 r135 top (schematic designator Q1)
Q1_U_KEY15 "AO3442" AO3442 -140.187,8.099 r135 top (schematic designator Q1)
Q1_U_KEY16 "AO3442" AO3442 -120.904,8.128 r135 top (schematic designator Q1)
Q1_U_KEY17 "AO3442" AO3442 -102.073,8.099 r135 top (schematic designator Q1)
Q1_U_KEY18 "AO3442" AO3442 -83.042,8.099 r135 top (schematic designator Q1)
Q1_U_KEY19 "AO3442" AO3442 -63.931,8.099 r135 top (schematic designator Q1)
Q1_U_KEY20 "AO3442" AO3442 -44.81,8.099 r135 top (schematic designator Q1)
Q1_U_KEY21 "AO3442" AO3442 -25.781,8.128 r135 top (schematic designator Q1)
Q1_U_KEY22 "AO3442" AO3442 -6.731,8.128 r135 top (schematic designator Q1)
Q1_U_KEY23 "AO3442" AO3442 12.947,7.455 r135 top (schematic designator Q1)
Q1_U_KEY24 "AO3442" AO3442 -213.72,-9.873 r135 top (schematic designator Q1)
Q1_U_KEY25 "AO3442" AO3442 -182.469,-10.734 r135 top (schematic designator Q1)
Q1_U_KEY26 "AO3442" AO3442 -163.576,-10.795 r135 top (schematic designator Q1)
Q1_U_KEY27 "AO3442" AO3442 -144.369,-10.734 r135 top (schematic designator Q1)
Q1_U_KEY28 "AO3442" AO3442 -125.363,-10.763 r135 top (schematic designator Q1)
Q1_U_KEY29 "AO3442" AO3442 -106.269,-10.607 r135 top (schematic designator Q1)
Q1_U_KEY30 "AO3442" AO3442 -87.346,-10.734 r135 top (schematic designator Q1)
Q1_U_KEY31 "AO3442" AO3442 -68.378,-10.816 r135 top (schematic designator Q1)
Q1_U_KEY32 "AO3442" AO3442 -49.022,-10.541 r135 top (schematic designator Q1)
Q1_U_KEY33 "AO3442" AO3442 -29.986,-10.636 r135 top (schematic designator Q1)
Q1_U_KEY34 "AO3442" AO3442 -11.048,-10.743 r135 top (schematic designator Q1)
Q1_U_KEY35 "AO3442" AO3442 8.383,-10.718 r135 top (schematic designator Q1)
Q1_U_KEY36 "AO3442" AO3442 35.228,-10.734 r135 top (schematic designator Q1)
Q1_U_KEY37 "AO3442" AO3442 -185.359,-55.455 r270 top (schematic designator Q1)
Q1_U_KEY38 "AO3442" AO3442 -165.674,-55.455 r270 top (schematic designator Q1)
Q1_U_KEY39 "AO3442" AO3442 -146.685,-55.245 r270 top (schematic designator Q1)
Q1_U_KEY40 "AO3442" AO3442 -126.622,-55.135 r270 top (schematic designator Q1)
Q1_U_KEY41 "AO3442" AO3442 -108.712,-55.118 r270 top (schematic designator Q1)
Q1_U_KEY42 "AO3442" AO3442 -91.584,-72.862 r270 top (schematic designator Q1)
Q1_U_KEY43 "AO3442" AO3442 -80.01,-55.337 r270 top (schematic designator Q1)
Q1_U_KEY44 "AO3442" AO3442 -67.818,-55.372 r270 top (schematic designator Q1)
Q1_U_KEY45 "AO3442" AO3442 -50.988,-55.28 r270 top (schematic designator Q1)
Q1_U_KEY46 "AO3442" AO3442 -31.591,-54.772 r270 top (schematic designator Q1)
Q1_U_KEY47 "AO3442" AO3442 -7.72,-54.882 r270 top (schematic designator Q1)
Q1_U_KEY48 "AO3442" AO3442 17.104,-55.28 r270 top (schematic designator Q1)
Q1_U_KEY49 "AO3442" AO3442 -18.923,-73.406 r270 top (schematic designator Q1)
Q1_U_KEY50 "AO3442" AO3442 4.572,-73.498 r270 top (schematic designator Q1)
Q1_U_KEY51 "AO3442" AO3442 29.696,-73.804 r270 top (schematic designator Q1)
R1 "100KΩ" 0603_R -273.177,-16.002 r90 top
R1_U_KEY1 "510Ω" 0603_R -228.092,38.1 r180 top (schematic designator R1)
R1_U_KEY2 "510Ω" 0603_R -181.016,37.973 r180 top (schematic designator R1)
R1_U_KEY3 "510Ω" 0603_R -161.966,37.719 r180 top (schematic designator R1)
R1_U_KEY4 "510Ω" 0603_R -142.789,37.592 r180 top (schematic designator R1)
R1_U_KEY5 "510Ω" 0603_R -123.993,37.719 r180 top (schematic designator R1)
R1_U_KEY6 "510Ω" 0603_R -104.943,37.922 r180 top (schematic designator R1)
R1_U_KEY7 "510Ω" 0603_R -85.004,37.922 r180 top (schematic designator R1)
R1_U_KEY8 "510Ω" 0603_R -65.954,37.922 r180 top (schematic designator R1)
R1_U_KEY9 "510Ω" 0603_R -47.352,37.958 r180 top (schematic designator R1)
R1_U_KEY10 "510Ω" 0603_R -28.616,38.232 r180 top (schematic designator R1)
R1_U_KEY11 "510Ω" 0603_R -9.947,38.354 r180 top (schematic designator R1)
R1_U_KEY12 "510Ω" 0603_R 9.779,38.1 r180 top (schematic designator R1)
R1_U_KEY13 "510Ω" 0603_R 28.788,38.684 r180 top (schematic designator R1)
R1_U_KEY14 "510Ω" 0603_R -157.226,10.16 r135 top (schematic designator R1)
R1_U_KEY15 "510Ω" 0603_R -138.014,10.16 r135 top (schematic designator R1)
R1_U_KEY16 "510Ω" 0603_R -118.654,10.16 r135 top (schematic designator R1)
R1_U_KEY17 "510Ω" 0603_R -99.9,10.16 r135 top (schematic designator R1)
R1_U_KEY18 "510Ω" 0603_R -80.869,10.16 r135 top (schematic designator R1)
R1_U_KEY19 "510Ω" 0603_R -61.758,10.16 r135 top (schematic designator R1)
R1_U_KEY20 "510Ω" 0603_R -42.637,10.16 r135 top (schematic designator R1)
R1_U_KEY21 "510Ω" 0603_R -23.465,10.16 r135 top (schematic designator R1)
R1_U_KEY22 "510Ω" 0603_R -4.41,10.16 r135 top (schematic designator R1)
R1_U_KEY23 "510Ω" 0603_R 15.12,9.515 r135 top (schematic designator R1)
R1_U_KEY24 "510Ω" 0603_R -211.547,-7.813 r135 top (schematic designator R1)
R1_U_KEY25 "510Ω" 0603_R -180.296,-8.674 r135 top (schematic designator R1)
R1_U_KEY26 "510Ω" 0603_R -161.373,-8.801 r135 top (schematic designator R1)
R1_U_KEY27 "510Ω" 0603_R -142.196,-8.674 r135 top (schematic designator R1)
R1_U_KEY28 "510Ω" 0603_R -123.19,-8.703 r135 top (schematic designator R1)
R1_U_KEY29 "510Ω" 0603_R -104.096,-8.547 r135 top (schematic designator R1)
R1_U_KEY30 "510Ω" 0603_R -85.173,-8.674 r135 top (schematic designator R1)
R1_U_KEY31 "510Ω" 0603_R -66.205,-8.756 r135 top (schematic designator R1)
R1_U_KEY32 "510Ω" 0603_R -46.692,-8.547 r135 top (schematic designator R1)
R1_U_KEY33 "510Ω" 0603_R -27.813,-8.576 r135 top (schematic designator R1)
R1_U_KEY34 "510Ω" 0603_R -8.875,-8.682 r135 top (schematic designator R1)
R1_U_KEY35 "510Ω" 0603_R 10.556,-8.658 r135 top (schematic designator R1)
R1_U_KEY36 "510Ω" 0603_R 37.401,-8.674 r135 top (schematic designator R1)
R1_U_KEY37 "510Ω" 0603_R -187.645,-58.503 r0 top (schematic designator R1)
R1_U_KEY38 "510Ω" 0603_R -167.96,-58.503 r0 top (schematic designator R1)
R1_U_KEY39 "510Ω" 0603_R -148.971,-58.293 r0 top (schematic designator R1)
R1_U_KEY40 "510Ω" 0603_R -128.908,-58.183 r0 top (schematic designator R1)
R1_U_KEY41 "510Ω" 0603_R -110.998,-58.166 r0 top (schematic designator R1)
R1_U_KEY42 "510Ω" 0603_R -93.87,-75.91 r0 top (schematic designator R1)
R1_U_KEY43 "510Ω" 0603_R -82.296,-58.385 r0 top (schematic designator R1)
R1_U_KEY44 "510Ω" 0603_R -70.104,-58.42 r0 top (schematic designator R1)
R1_U_KEY45 "510Ω" 0603_R -53.274,-58.328 r0 top (schematic designator R1)
R1_U_KEY46 "510Ω" 0603_R -33.877,-57.82 r0 top (schematic designator R1)
R1_U_KEY47 "510Ω" 0603_R -10.006,-57.93 r0 top (schematic designator R1)
R1_U_KEY48 "510Ω" 0603_R 14.818,-58.328 r0 top (schematic designator R1)
R1_U_KEY49 "510Ω" 0603_R -21.209,-76.454 r0 top (schematic designator R1)
R1_U_KEY50 "510Ω" 0603_R 2.286,-76.546 r0 top (schematic designator R1)
R1_U_KEY51 "510Ω" 0603_R 27.41,-76.852 r0 top (schematic designator R1)
R2 "100KΩ" 0603_R -266.954,-16.637 r180 top
R2_U_KEY1 "10KΩ" 0603_R -230.251,35.052 r90 top (schematic designator R2)
R2_U_KEY2 "10KΩ" 0603_R -183.556,35.052 r90 top (schematic designator R2)
R2_U_KEY3 "10KΩ" 0603_R -164.506,34.798 r90 top (schematic designator R2)
R2_U_KEY4 "10KΩ" 0603_R -145.329,34.671 r90 top (schematic designator R2)
R2_U_KEY5 "10KΩ" 0603_R -126.533,34.798 r90 top (schematic designator R2)
R2_U_KEY6 "10KΩ" 0603_R -107.483,35.001 r90 top (schematic designator R2)
R2_U_KEY7 "10KΩ" 0603_R -87.544,35.001 r90 top (schematic designator R2)
R2_U_KEY8 "10KΩ" 0603_R -68.494,35.001 r90 top (schematic designator R2)
R2_U_KEY9 "10KΩ" 0603_R -49.892,35.037 r90 top (schematic designator R2)
R2_U_KEY10 "10KΩ" 0603_R -31.156,35.311 r90 top (schematic designator R2)
R2_U_KEY11 "10KΩ" 0603_R -12.487,35.433 r90 top (schematic designator R2)
R2_U_KEY12 "10KΩ" 0603_R 7.239,35.179 r90 top (schematic designator R2)
R2_U_KEY13 "10KΩ" 0603_R 26.248,35.763 r90 top (schematic designator R2)
R2_U_KEY14 "10KΩ" 0603_R -162.133,10.153 r0 top (schematic designator R2)
R2_U_KEY15 "10KΩ" 0603_R -142.921,10.153 r0 top (schematic designator R2)
R2_U_KEY16 "10KΩ" 0603_R -123.561,10.153 r0 top (schematic designator R2)
R2_U_KEY17 "10KΩ" 0603_R -104.807,10.153 r0 top (schematic designator R2)
R2_U_KEY18 "10KΩ" 0603_R -85.776,10.153 r0 top (schematic designator R2)
R2_U_KEY19 "10KΩ" 0603_R -66.664,10.153 r0 top (schematic designator R2)
R2_U_KEY20 "10KΩ" 0603_R -47.544,10.153 r0 top (schematic designator R2)
R2_U_KEY21 "10KΩ" 0603_R -28.372,10.153 r0 top (schematic designator R2)
R2_U_KEY22 "10KΩ" 0603_R -9.317,10.153 r0 top (schematic designator R2)
R2_U_KEY23 "10KΩ" 0603_R 10.214,9.508 r0 top (schematic designator R2)
R2_U_KEY24 "10KΩ" 0603_R -216.289,-7.493 r0 top (schematic designator R2)
R2_U_KEY25 "10KΩ" 0603_R -185.038,-8.354 r0 top (schematic designator R2)
R2_U_KEY26 "10KΩ" 0603_R -166.115,-8.481 r0 top (schematic designator R2)
R2_U_KEY27 "10KΩ" 0603_R -146.938,-8.354 r0 top (schematic designator R2)
R2_U_KEY28 "10KΩ" 0603_R -127.932,-8.383 r0 top (schematic designator R2)
R2_U_KEY29 "10KΩ" 0603_R -108.838,-8.227 r0 top (schematic designator R2)
R2_U_KEY30 "10KΩ" 0603_R -89.915,-8.354 r0 top (schematic designator R2)
R2_U_KEY31 "10KΩ" 0603_R -70.947,-8.436 r0 top (schematic designator R2)
R2_U_KEY32 "10KΩ" 0603_R -51.434,-8.227 r0 top (schematic designator R2)
R2_U_KEY33 "10KΩ" 0603_R -32.555,-8.256 r0 top (schematic designator R2)
R2_U_KEY34 "10KΩ" 0603_R -13.617,-8.362 r0 top (schematic designator R2)
R2_U_KEY35 "10KΩ" 0603_R 5.814,-8.338 r0 top (schematic designator R2)
R2_U_KEY36 "10KΩ" 0603_R 32.659,-8.354 r0 top (schematic designator R2)
R2_U_KEY37 "10KΩ" 0603_R -188.28,-55.328 r270 top (schematic designator R2)
R2_U_KEY38 "10KΩ" 0603_R -168.595,-55.328 r270 top (schematic designator R2)
R2_U_KEY39 "10KΩ" 0603_R -149.606,-55.118 r270 top (schematic designator R2)
R2_U_KEY40 "10KΩ" 0603_R -129.543,-55.008 r270 top (schematic designator R2)
R2_U_KEY41 "10KΩ" 0603_R -111.633,-54.991 r270 top (schematic designator R2)
R2_U_KEY42 "10KΩ" 0603_R -94.505,-72.735 r270 top (schematic designator R2)
R2_U_KEY43 "10KΩ" 0603_R -82.931,-55.21 r270 top (schematic designator R2)
R2_U_KEY44 "10KΩ" 0603_R -70.739,-55.245 r270 top (schematic designator R2)
R2_U_KEY45 "10KΩ" 0603_R -53.909,-55.153 r270 top (schematic designator R2)
R2_U_KEY46 "10KΩ" 0603_R -34.512,-54.645 r270 top (schematic designator R2)
R2_U_KEY47 "10KΩ" 0603_R -10.641,-54.755 r270 top (schematic designator R2)
R2_U_KEY48 "10KΩ" 0603_R 14.183,-55.153 r270 top (schematic designator R2)
R2_U_KEY49 "10KΩ" 0603_R -21.844,-73.279 r270 top (schematic designator R2)
R2_U_KEY50 "10KΩ" 0603_R 1.651,-73.371 r270 top (schematic designator R2)
R2_U_KEY51 "10KΩ" 0603_R 26.775,-73.677 r270 top (schematic designator R2)
R5 "1KΩ" 0603_R -258.31,-4.572 r180 top
R6 "10KΩ" 0603_R -105.029,46.99 r270 top
R7 "10KΩ" 0603_R -23.368,47.117 r270 top
R8 "10KΩ" 0603_R -23.368,43.307 r90 top
R9 "10KΩ" 0603_R -124.968,-80.01 r0 top
R10 "10KΩ" 0603_R -129.04,-80.01 r0 top
R11 "220Ω" 0603_R -266.954,42.799 r90 top
R12 "220Ω" 0603_R -266.954,-66.81 r90 top
S1 "GAQY212GSX" SOP-4_L4.3-W4.4-P2.54-LS6.8-TR -260.575,42.926 r90 top
S2 "GAQY212GSX" SOP-4_L4.3-W4.4-P2.54-LS6.8-TR -260.35,-66.675 r90 top
SW1 "KMR231GLFS" KMR231GLFS -255.327,-0.852 r0 top
U1 "CELL HOLDER" "BAT_MX 1.25-WI-2P" -277.114,-14.361 r270 top
U2 "AP2112K-3.3TRG1" SOT95P285X140-5N -261.874,-14.986 r0 top
U3 "MDBT42Q-512KV2" SMD_10.0X16.0 -271.526,0.508 r90 top locked
U4 "USB_CHARGING_BOARD" "FPC0.5 2H-WS-8P" -278.384,-25.527 r270 top
X1 "32.768KHz" "SMD-3215_2P FC - 135" -263.017,-2.54 r270 top

## Footprints (in the part's own frame and the unit in brackets; to place one, negate y for a bottom-side part, rotate by r counter-clockwise, add the part's x,y. Pads: shape width x height; smd on the part's side, far side on the other; paste and mask are expansions set on the pad)
0402_L [mm]
  rect 0.6x0.65 smd mask+0.051: 1(-0.425,0) 2(0.425,0)
  silkscreen extent -0.97,-0.58 0.97,0.58, body extent -0.51,-0.26 0.54,0.26, height 0.36
0603_C [mm]
  rect 0.93x0.98 smd: 1(-0.77,0) 2(0.77,0)
  silkscreen extent -1.53,-0.79 1.54,0.79, body extent -0.8,-0.4 0.8,0.4, height 0.3
0603_R [mm]
  rect 0.93x0.98 smd: 1(-0.77,0) 2(0.77,0)
  silkscreen extent -1.53,-0.79 1.54,0.79, body extent -0.85,-0.4 0.85,0.4, height 0.56
AO3442 [mm]
  rect 1.07x0.6 smd: 1(1.235,-0.95) 2(1.235,0.95) 3(-1.235,0)
  silkscreen extent -0.88,-1.54 0.88,1.54
"BAT_MX 1.25-WI-2P" [mm] "长：4.25mm，宽：1.8mm，高：3.3mm"
  rect 1x1 hole 0.5: 1(-0.625,0)
  round 1 hole 0.5: 2(0.625,0)
  silkscreen extent -2.24,-4.19 2.24,0.85, body extent -2.12,-4.05 2.13,0.85, height 3.35
DSK16 [mm]
  rect 0.95x1.15 smd: 1(-1.692,0) 2(1.692,0)
  silkscreen extent -1.58,-0.87 1.41,0.87
"FPC0.5 2H-WS-8P" [mm] "长：8.2mm，宽：5.2mm，高：2mm 淘宝ID:黄晶宝石   店铺网址:https://shop463601444.taobao.com"
  rect 1.8x2.2 smd: 0(-3.4,0) 0(3.4,0)
  rect 0.3x1.3 smd: 1(-1.75,2.497) 2(-1.25,2.497) 3(-0.75,2.497) 4(-0.25,2.497) 5(0.25,2.497) 6(0.75,2.497) 7(1.25,2.497) 8(1.75,2.497)
  silkscreen extent -4.17,-3.3 4.17,3.23, body extent -3.75,-2.99 3.75,2.41, height 2.92
KMR231GLFS [mm]
  rect 1x1.1 smd: 1(-2.3,-1.162) 2(-2.3,0.438) 3(2.3,-1.162) 4(2.3,0.438)
  rect 2x0.7 smd: 5(0,1.162)
  silkscreen extent -2.1,-1.76 2.1,1.04, body extent -2.31,-1.65 2.29,1.15, height 1.92
PADDING1#1 [mil]
  rrect50% 100x60 smd: 1(0,0)
PADDING1#2 [mil]
  rrect50% 100x60 smd rot 135: 1(0,0)
PADDING2 [mil]
  rrect50% 400x240 smd: 1(0,0)
"SMD-3215_2P FC - 135" [mm]
  rect 1x1.8 smd: 1(-1.25,0) 2(1.25,0)
  silkscreen extent -2.05,-1.2 2.05,1.2, body extent -1.55,-0.75 1.65,0.75, height 0.89
SMD_10.0X16.0 [mm]
  rect 1.4x0.8 smd: 1(-4.6,5.7) 39(4.6,5.7)
  rect 1.4x0.4 smd: 2(-4.6,2.7) 3(-4.6,2) 4(-4.6,1.3) 5(-4.6,0.6) 6(-4.6,-0.1) 7(-4.6,-0.8) 8(-4.6,-1.5) 9(-4.6,-2.2) 10(-4.6,-2.9) 11(-4.6,-3.6) 25(4.6,-4.3) 26(4.6,-3.6) 27(4.6,-2.9) 28(4.6,-2.2) 29(4.6,-1.5) 30(4.6,-0.8) 31(4.6,-0.1) 32(4.6,0.6) 33(4.6,1.3) 34(4.6,2) 35(4.6,2.7) 36(4.6,3.4) 37(4.6,4.1) 38(4.6,4.8)
  rect 0.4x1.4 smd: 12(-4.2,-5.7) 13(-3.5,-5.7) 14(-2.8,-5.7) 15(-2.1,-5.7) 16(-1.4,-5.7) 17(-0.7,-5.7) 18(0,-5.7) 19(0.7,-5.7) 20(1.4,-5.7) 21(2.1,-5.7) 22(2.8,-5.7) 23(3.5,-5.7) 24(4.2,-5.7)
  rect 1x0.4 smd: 40(2.9,5.15) 41(2.9,3.75)
  silkscreen extent -6.45,-6.1 5,9.9, body extent -5,-6.09 5,9.9, height 2.2
SOD-123 [mm]
  rect 1.25x1 smd: 1(1.475,0) 2(-1.475,0)
  silkscreen extent -0.5,-0.7 0.5,0.7, body extent -1.85,-0.77 1.85,0.78, height 1.35
SOD-323F [mm]
  rect 1x0.83 smd: 1(1.18,0) 2(-1.18,0)
  silkscreen extent -0.4,-0.6 0.4,0.6, body extent -1.4,-0.67 1.4,0.68, height 0.75
SOIC127P1030X265-28N [mm]
  rect 1.85x0.65 smd: 1(-4.675,8.255) 2(-4.675,6.985) 3(-4.675,5.715) 4(-4.675,4.445) 5(-4.675,3.175) 6(-4.675,1.905) 7(-4.675,0.635) 8(-4.675,-0.635) 9(-4.675,-1.905) 10(-4.675,-3.175) 11(-4.675,-4.445) 12(-4.675,-5.715) 13(-4.675,-6.985) 14(-4.675,-8.255) 15(4.675,-8.255) 16(4.675,-6.985) 17(4.675,-5.715) 18(4.675,-4.445) 19(4.675,-3.175) 20(4.675,-1.905) 21(4.675,-0.635) 22(4.675,0.635) 23(4.675,1.905) 24(4.675,3.175) 25(4.675,4.445) 26(4.675,5.715) 27(4.675,6.985) 28(4.675,8.255)
  silkscreen extent -5.6,-8.95 3.4,8.95, body extent -5.15,-8.95 5.15,8.95, height 2.65
SOP-4_L4.3-W4.4-P2.54-LS6.8-TR [mm]
  oval 0.9x2 smd: 1(1.27,3.4) 2(-1.27,3.4) 3(-1.27,-3.4) 4(1.27,-3.4)
  silkscreen extent -2.15,-2.2 2.54,3.32
SOT95P285X140-5N [mm]
  rrect15% 1.35x0.6 smd: 1(-1.185,0.95) 2(-1.185,0) 3(-1.185,-0.95) 4(1.185,-0.95) 5(1.185,0.95)
  silkscreen extent -2.57,-1.55 0.85,1.55, body extent -1.4,-1.5 1.4,1.5, height 1.4
SOT-23(SOT-23-3) [mm]
  rect 1.25x0.7 smd: 1(1.25,-0.95) 2(1.25,0.95) 3(-1.25,0)
  silkscreen extent -0.65,-1.46 0.9,1.46, body extent -1.5,-1.5 1.5,1.5, height 1.3
VQFN-16_EP_3.0x3.0xo.5P [mm]
  rrect25% 0.86x0.26 smd: 1(-1.435,0.75) 2(-1.435,0.25) 3(-1.435,-0.25) 4(-1.435,-0.75) 9(1.435,-0.75) 10(1.435,-0.25) 11(1.435,0.25) 12(1.435,0.75)
  rrect25% 0.26x0.86 smd: 5(-0.75,-1.435) 6(-0.25,-1.435) 7(0.25,-1.435) 8(0.75,-1.435) 13(0.75,1.435) 14(0.25,1.435) 15(-0.25,1.435) 16(-0.75,1.435)
  rect 1.71x1.71 smd paste-2: 17(0,0)
  silkscreen extent -2.59,-1.55 1.55,1.55, body extent -1.55,-1.55 1.55,1.55, height 1